# Altium PCB MainBoardCurrent.PcbDoc (part 1 of 2)
Units mil, origin at the board's own origin, x right, y up, seen from the top; angles counter-clockwise.
Board outline 3540 x 3540 mil, 4 copper layers (Top Copper, GND, PWR, Bottom Copper), stack 61.811 mil thick; 59 components, 71 nets, 545 pads, 135 vias.
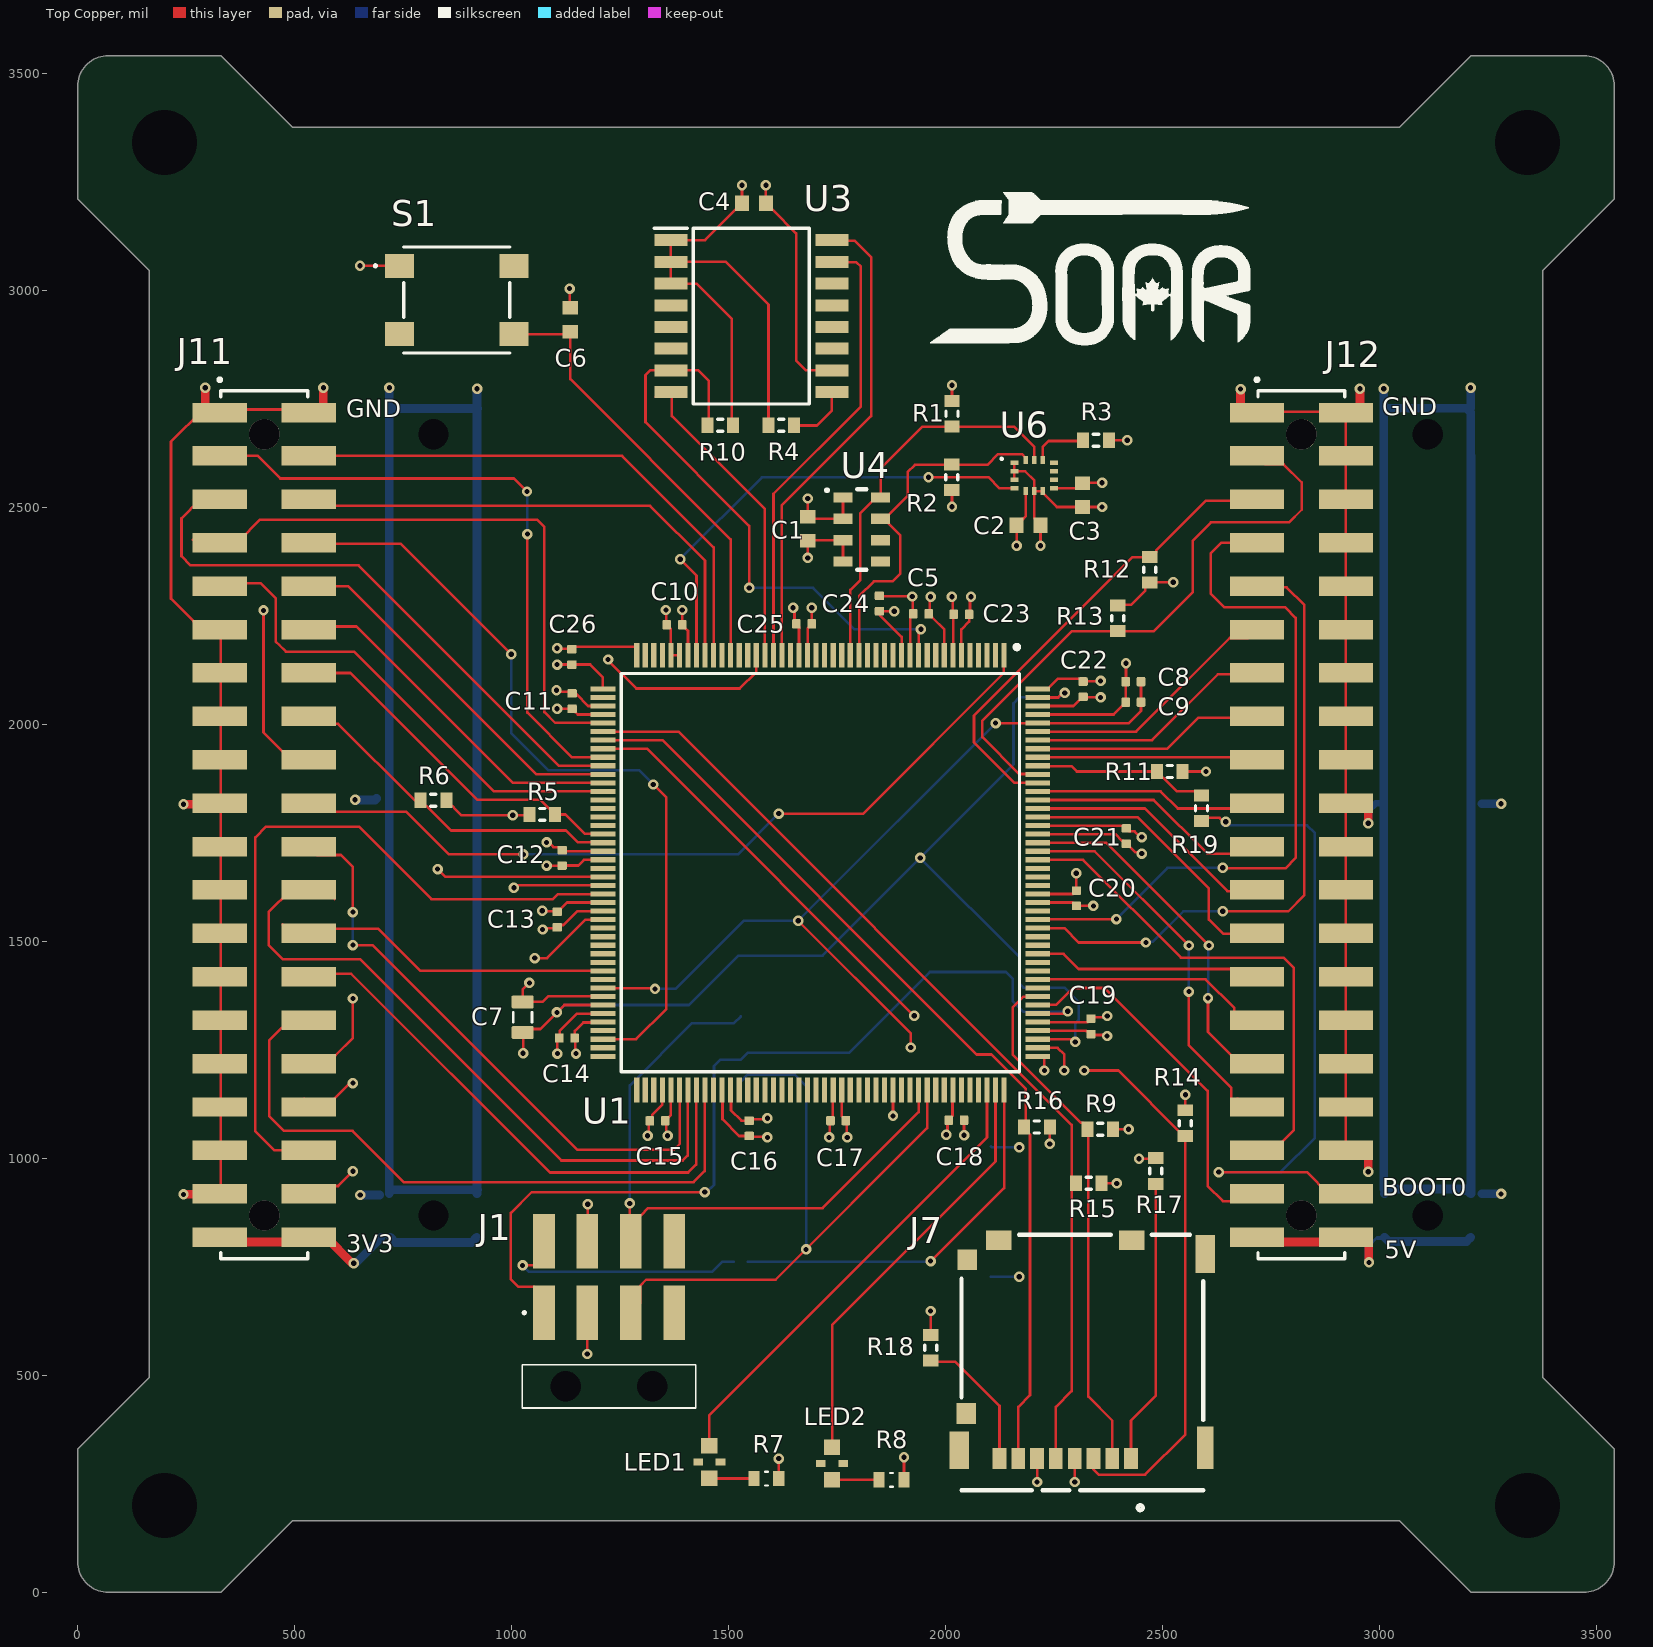
[diagram p0: Top Copper view]
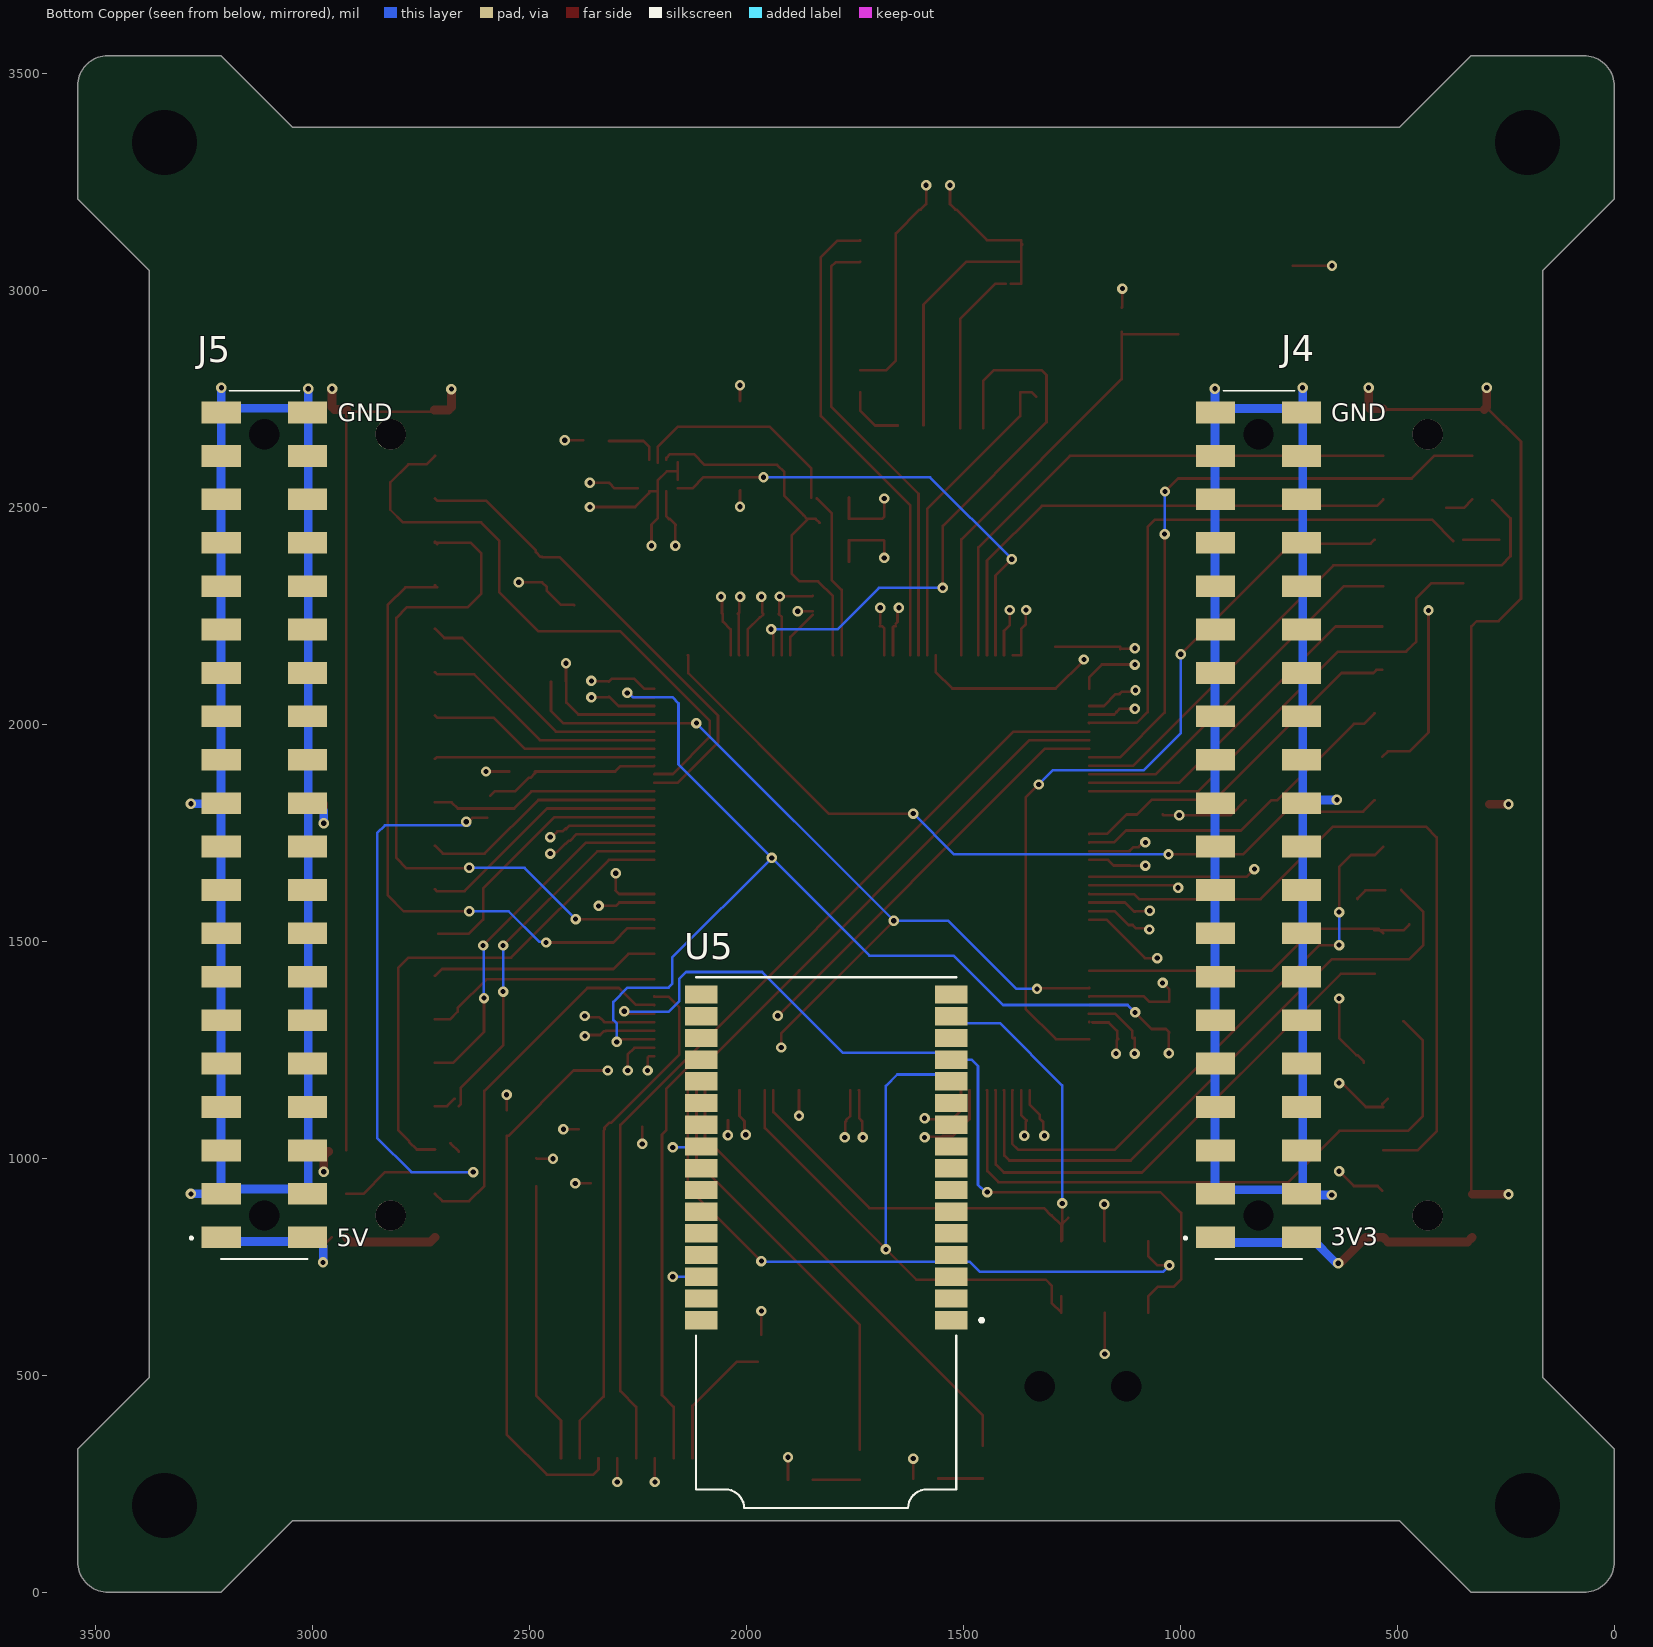
[diagram p1: Bottom Copper view, seen from below]
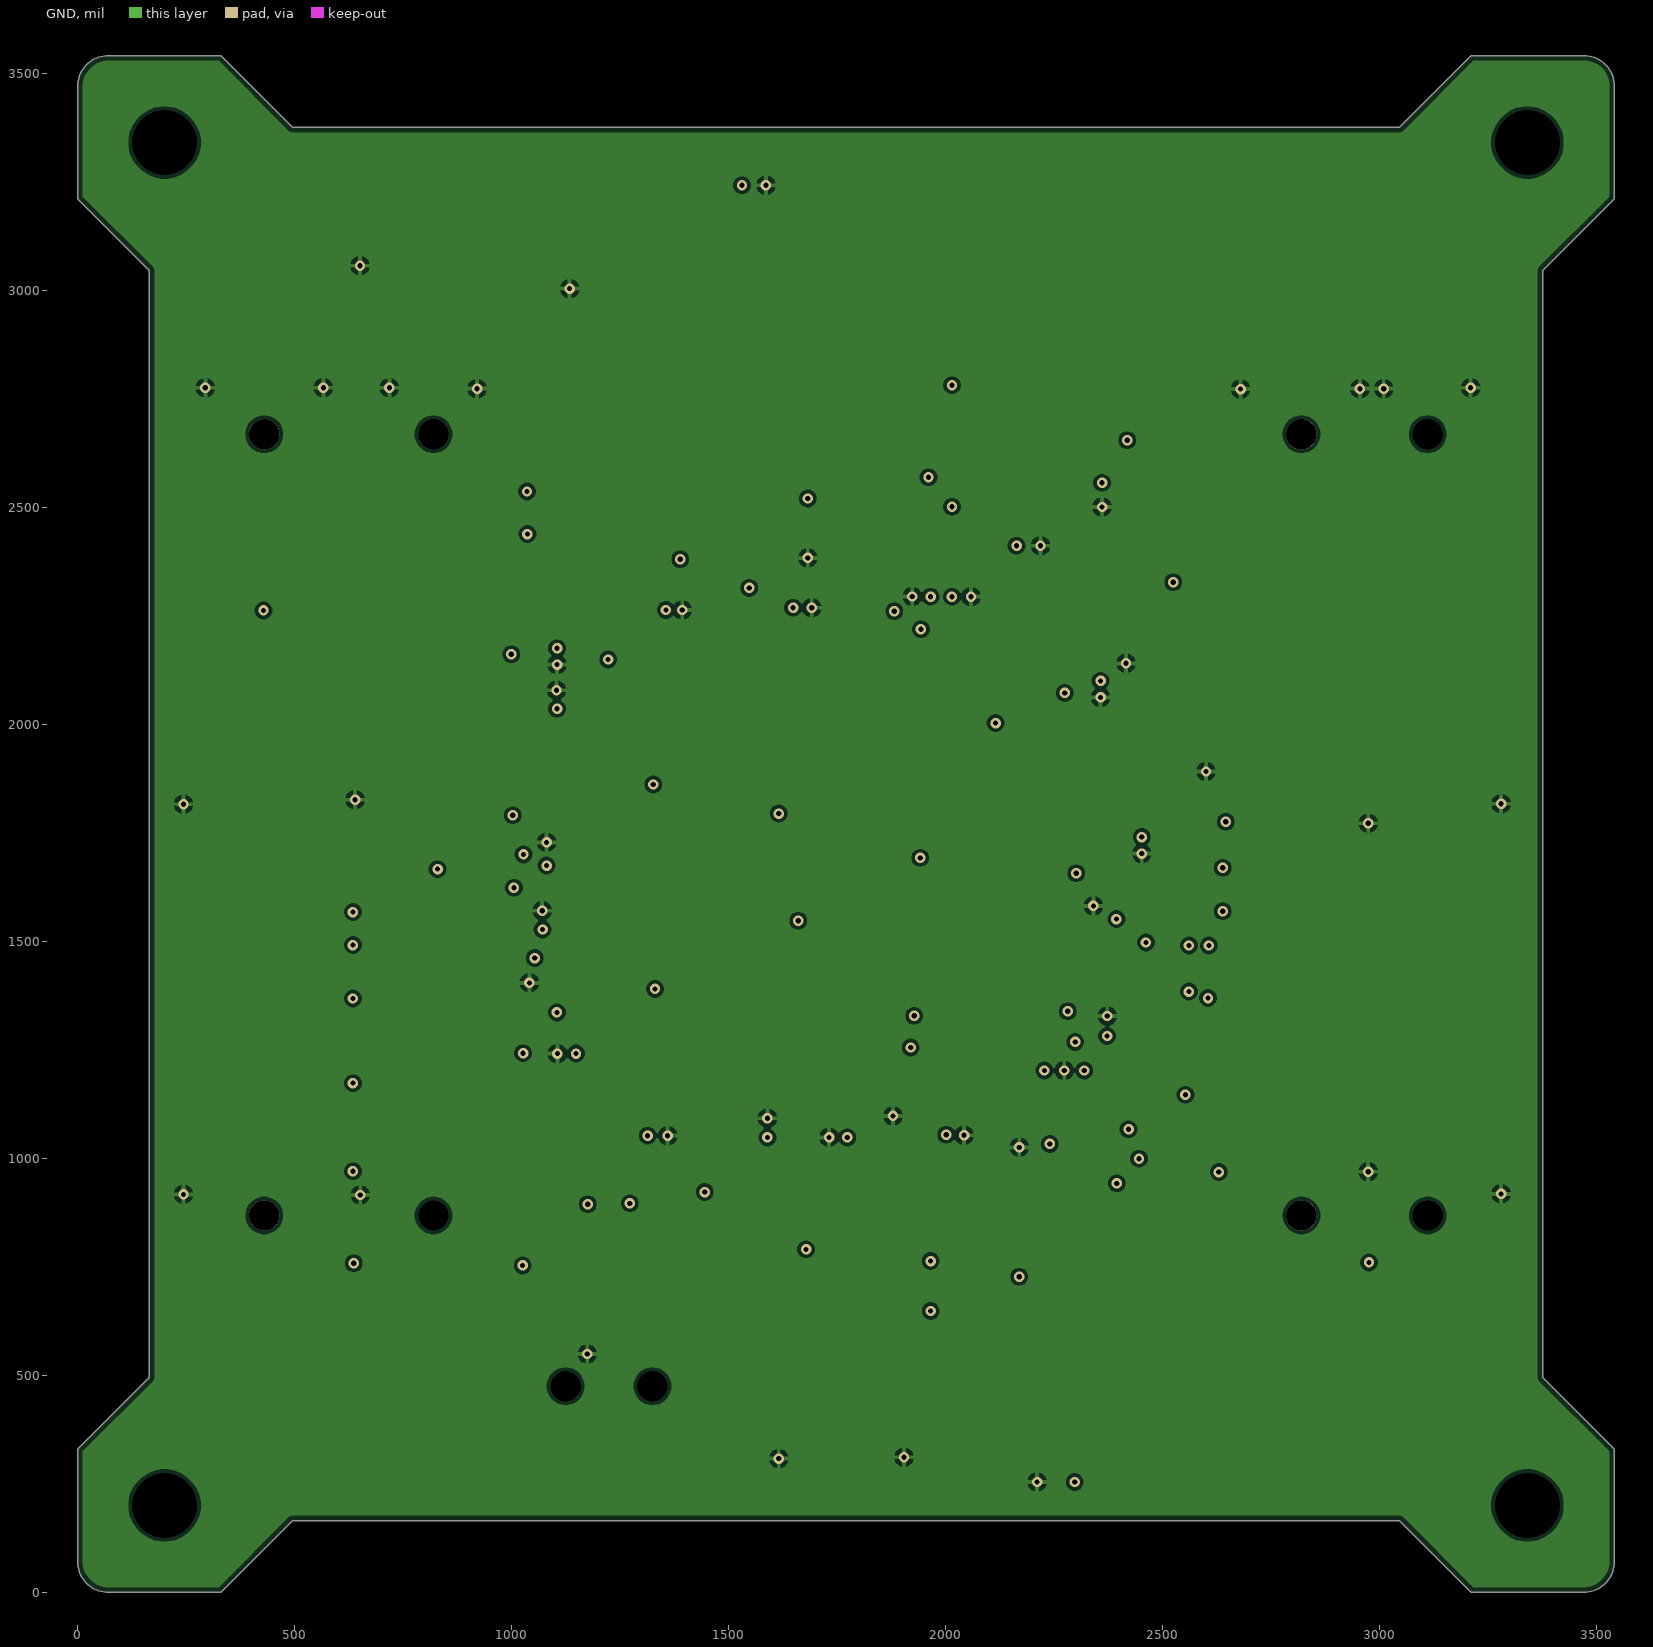
[diagram p2: GND]
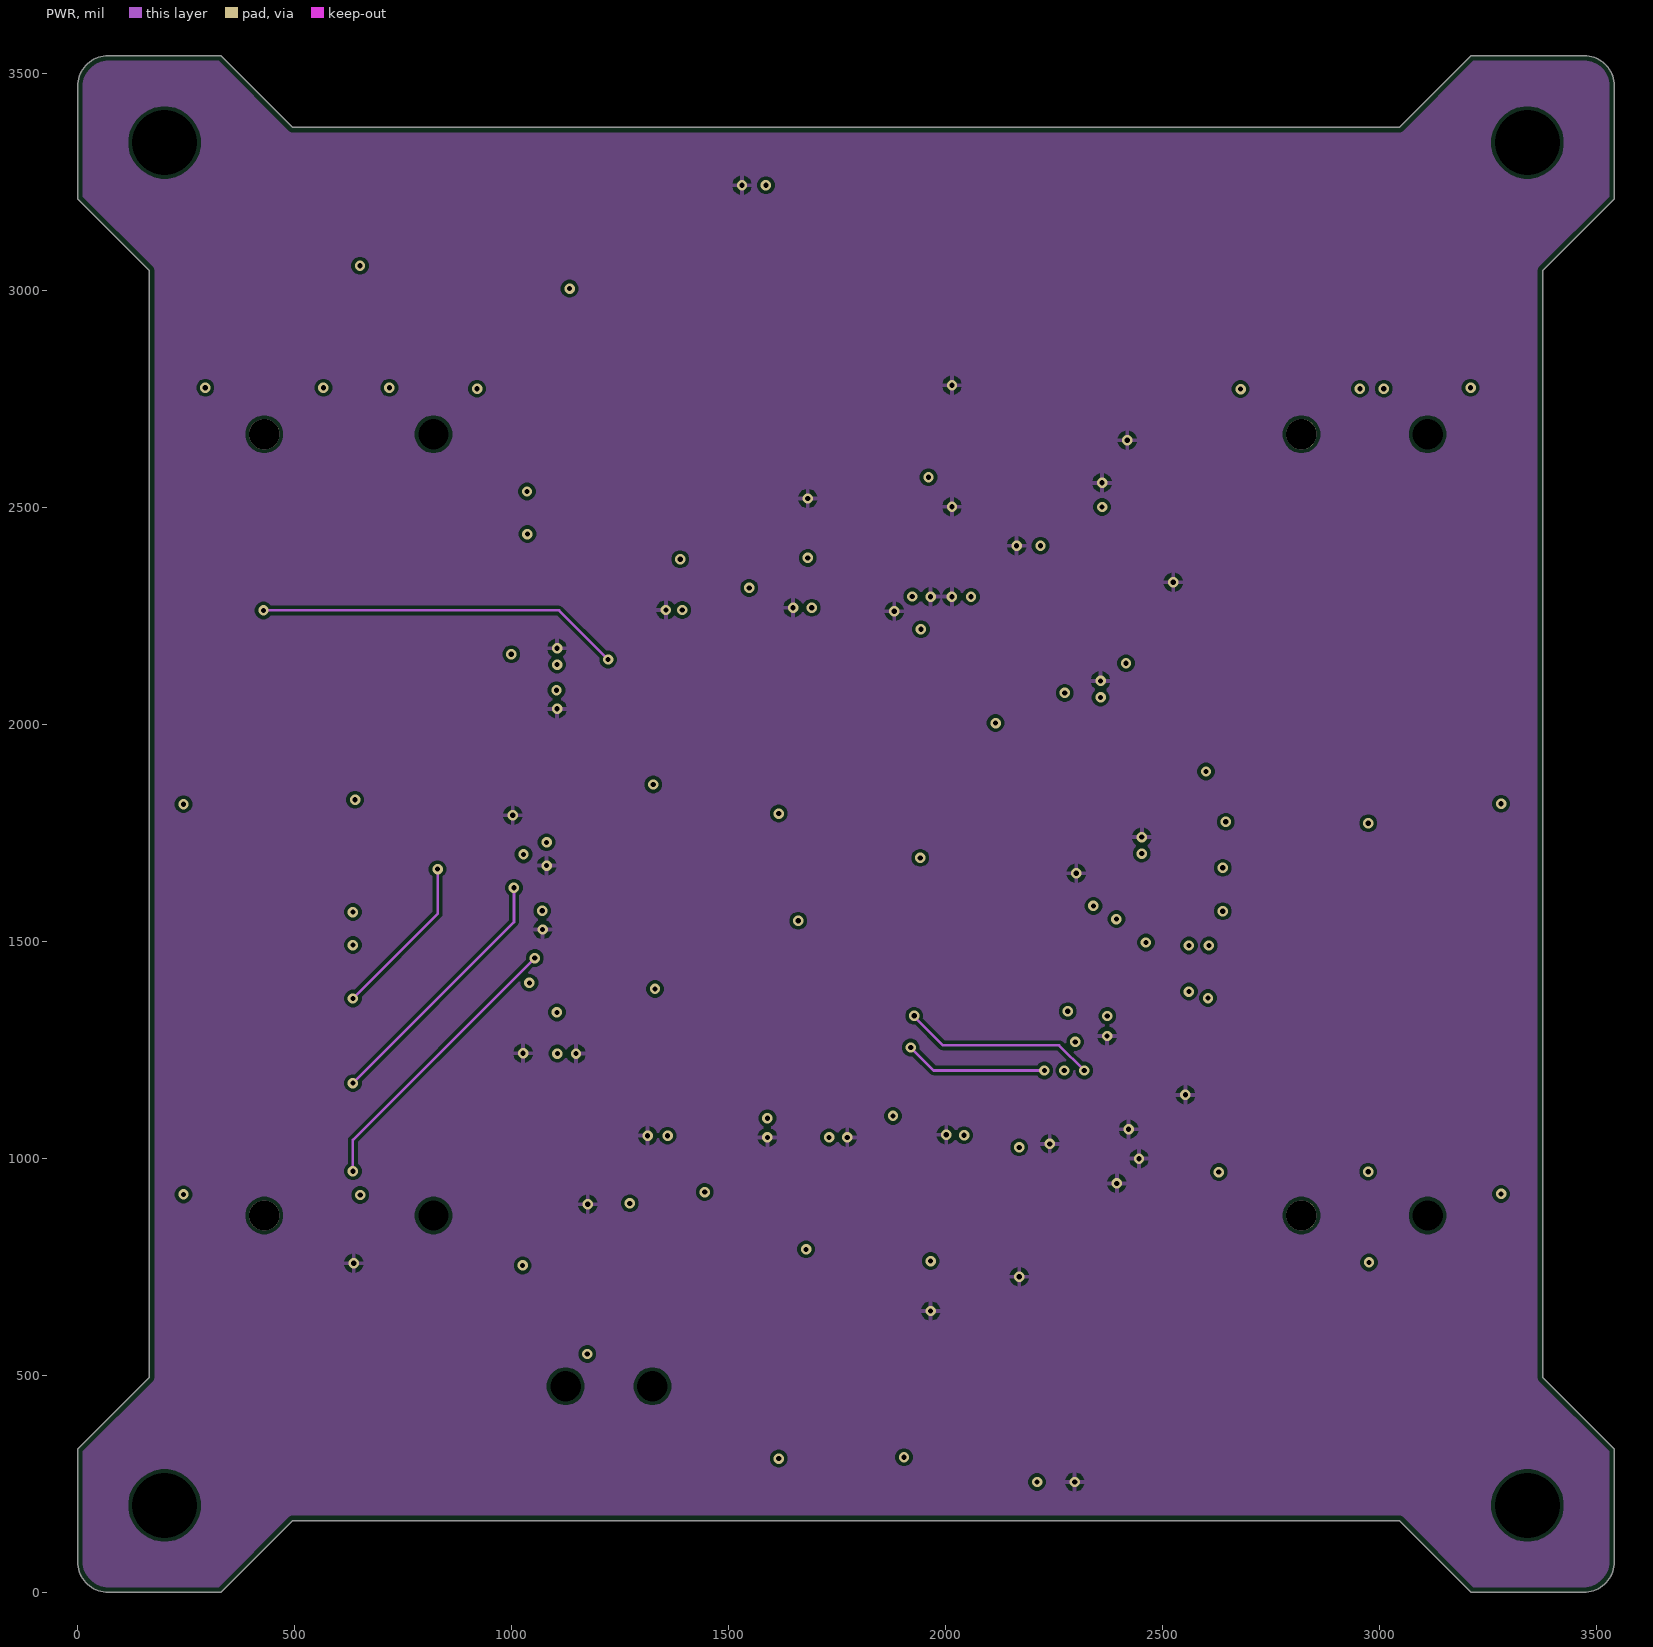
[diagram p3: PWR]

## Layer stack, top to bottom
Top Mask: solder mask 0.591, Solder Resist, Dk 3.8
Top Copper: signal copper 1.378
Dielectric 1: prepreg 7.874, 7628, Dk 4.6
GND: signal copper 0.689
Core: core 41.929, FR-4, Dk 4.5
PWR: signal copper 0.689
Dielectric 2: prepreg 7.874, 7628, Dk 4.6
Bottom Copper: signal copper 1.378
Bottom Mask: solder mask 0.591, Solder Resist, Dk 3.8

## Board outline
0,3470 cw(c70,3470) 70,3540 330,3540 495,3375 3045,3375 3210,3540 3471,3540 cw(c3471,3471) 3540,3471 3540,3210 3375,3045 3375,495 3540,330 3540,70 cw(c3470,70) 3470,0 3210,0 3045,165 495,165 330,0 70,0 cw(c70,70) 0,70 0,330 165,495 165,3045 0,3210

## Design rules (kind name [scope] priority, off if disabled: settings)
BoardOutlineClearance [All] p1: gap=11.81 ignorepadtopadclearanceinfootprint=FALSE except(15.75: Arc-SplitBarrior Arc-SplitContinuation Track-SplitBarrior Track-SplitContinuation SMDPad-SplitBarrior SMDPad-SplitContinuation THPad-SplitBarrior THPad-SplitContinuation Via-SplitBarrior Via-SplitContinuation Fill-SplitBarrior Fill-SplitContinuation Poly-SplitBarrior Poly-SplitContinuation Region-SplitBarrior Region-SplitContinuation Text-SplitBarrior Text-SplitContinuation)
Clearance "Clearance Different Nets" [All] p1: gap=7.87 ignorepadtopadclearanceinfootprint=FALSE except(3.5: Arc-Arc Arc-Track Arc-SMDPad Track-Track Track-SMDPad; 5: SMDPad-SMDPad SMDPad-Via THPad-Via Via-Via; 10: Arc-Via Arc-Text Track-Via Track-Text SMDPad-Text THPad-Text Via-Text Fill-Text Poly-Text Region-Text Text-Text; 19.68: THPad-THPad Via-Hole)
Clearance "Clearance Same Nets" [All] p2: gap=7.87 ignorepadtopadclearanceinfootprint=FALSE except(3.5: Arc-Arc Arc-Track Arc-SMDPad Track-Track Track-SMDPad SMDPad-SMDPad; 5: SMDPad-Via THPad-Via; 10: Arc-Via Arc-Text Track-Via Track-Text SMDPad-Text THPad-Text Via-Via Via-Text Fill-Text Poly-Text Region-Text Text-Text)
Clearance "Clearance Bottom Layer" [OnLayer('Bottom Layer')] p3: gap=8 ignorepadtopadclearanceinfootprint=TRUE except(10: Arc-Text Track-Text SMDPad-Text THPad-Text Via-Text Fill-Text Poly-Text Region-Text Text-Text)
Clearance "Clearance Top Layer" [OnLayer('Top Layer')] p4: gap=8 ignorepadtopadclearanceinfootprint=TRUE except(10: Arc-Text Track-Text SMDPad-Text THPad-Text Via-Text Fill-Text Poly-Text Region-Text Text-Text)
Clearance [All] p5: gap=10 ignorepadtopadclearanceinfootprint=TRUE except(0: Arc-Hole Track-Hole SMDPad-Hole THPad-Hole Via-Hole Fill-Hole Poly-Hole Region-Hole Text-Hole)
HoleSize [All] p1: absolutevalues=TRUE maxlimit=248.03 minlimit=7.87 maxpercent=80.000 minpercent=20.000
MinimumAnnularRing [All] p1: minimumring=5.12
MinimumSolderMaskSliver [All] p1: minsoldermaskwidth=3.5
PolygonConnect PolygonConnect_1 [(HasFootprint('CAPC0805(2012)145_L') AND InNet('3V3'))] p1: thpad.connectstyle=Relief thpad.reliefconductorwidth=10 thpad.reliefentries=4 thpad.polygonreliefangle="90 Angle" thpad.airgapwidth=10 smdpad.connectstyle=Relief smdpad.reliefconductorwidth=10 smdpad.reliefentries=4 smdpad.polygonreliefangle="90 Angle" smdpad.airgapwidth=10 via.connectstyle=NoConnect via.reliefconductorwidth=10 via.reliefentries=4 via.polygonreliefangle="90 Angle" via.airgapwidth=10
PolygonConnect PolygonConnect_7 [All vs IsNamedPolygon('NONET_L03_P003')] p2: thpad.connectstyle=Relief thpad.reliefconductorwidth=10 thpad.reliefentries=4 thpad.polygonreliefangle="90 Angle" thpad.airgapwidth=10 smdpad.connectstyle=Relief smdpad.reliefconductorwidth=10 smdpad.reliefentries=4 smdpad.polygonreliefangle="90 Angle" smdpad.airgapwidth=10 via.connectstyle=Direct via.reliefconductorwidth=10 via.reliefentries=4 via.polygonreliefangle="90 Angle" via.airgapwidth=10
PolygonConnect PWR [All vs IsNamedPolygon('3V3_PWR')] p3: connectstyle=Relief reliefconductorwidth=10 reliefentries=4 polygonreliefangle="90 Angle" airgapwidth=10
PolygonConnect PolygonConnect_3 [All vs IsNamedPolygon('NONET_L03_P003')] p4: thpad.connectstyle=Direct thpad.reliefconductorwidth=10 thpad.reliefentries=4 thpad.polygonreliefangle="90 Angle" thpad.airgapwidth=10 smdpad.connectstyle=Relief smdpad.reliefconductorwidth=10 smdpad.reliefentries=4 smdpad.polygonreliefangle="90 Angle" smdpad.airgapwidth=10 via.connectstyle=Relief via.reliefconductorwidth=10 via.reliefentries=4 via.polygonreliefangle="90 Angle" via.airgapwidth=10
PolygonConnect [All] p5: connectstyle=Relief reliefconductorwidth=10 reliefentries=4 polygonreliefangle="90 Angle" airgapwidth=10
RoutingCorners [All] p1: cornerstyle=Round minsetback=100 maxsetback=100
RoutingVias [All] p1: holewidth=19.68 width=39.37 viastyle="Through Hole" minholewidth=7.87 minwidth=13.78 maxholewidth=39.37 maxwidth=78.74
SilkToSilkClearance [All] p1: silktosilkclearance=3.94
SilkToSolderMaskClearance [IsPad] p1: minsilkscreentomaskgap=3.94 clearancetoexposedcopper=TRUE
SolderMaskExpansion [All] p1: expansion=2 istentingtop=FALSE
Width [All] p1: maxlimit=100 minlimit=3.5 preferedwidth=15
Width RF [InNetClass('RF')] p2: maxlimit=20 minlimit=6 preferedwidth=10 minimp=50.000000 maximp=50.000000 favimp=50.000000
Width Width_1 [All] p3: maxlimit=20 minlimit=6 preferedwidth=6 minimp=50.000000 maximp=50.000000 favimp=50.000000
25 further rules are at their usual default settings.

## Classes and differential pairs
polygon class Top_GND: STLINK-GND_L03_P003

## Components (designator, comment, footprint, x,y, rotation, side; value= is the part's Value field where it differs from the comment)
C1 "0.1uF" 1608[0603] 1682,2450 r90 top
C2 "0.1uF" 1608[0603] 2190.56,2458 r0 top
C3 "0.1uF" 1608[0603] 2314.92,2527.81 r90 top
C4 "0.1uF" 1608[0603] 1558,3200 r180 top
C5 "Capacitor 100nF +/-20% 25V 0402" CAPC0402(1005)60_L 1942.69,2254.15 r180 top value=100nF
C6 "0.1uF" 1608[0603] 1135,2932 r270 top
C7 "Capacitor 4.7µF +/-40% 25V 0805" CAPC0805(2012)145_L 1025,1325 r90 top value=4.7µF
C8 "Capacitor 2,2µF +/-20% 10V 0402" CAPC0402(1005)60_L 2431.95,2098.12 r180 top value=2.2µF
C9 "Capacitor 2,2µF +/-20% 10V 0402" CAPC0402(1005)60_L 2431.95,2050.71 r180 top value=2.2µF
C10 "Capacitor 100nF +/-20% 25V 0402" CAPC0402(1005)60_L 1375,2229 r0 top value=100nF
C11 "Capacitor 100nF +/-20% 25V 0402" CAPC0402(1005)60_L 1139,2053 r90 top value=100nF
C12 "Capacitor 100nF +/-20% 25V 0402" CAPC0402(1005)60_L 1116,1692 r90 top value=100nF
C13 "Capacitor 100nF +/-20% 25V 0402" CAPC0402(1005)60_L 1104.51,1549.73 r90 top value=100nF
C14 "Capacitor 100nF +/-20% 25V 0402" CAPC0402(1005)60_L 1127,1277 r180 top value=100nF
C15 "Capacitor 100nF +/-20% 25V 0402" CAPC0402(1005)60_L 1335.9,1086 r0 top value=100nF
C16 "Capacitor 100nF +/-20% 25V 0402" CAPC0402(1005)60_L 1547,1069 r90 top value=100nF
C17 "Capacitor 100nF +/-20% 25V 0402" CAPC0402(1005)60_L 1752,1086.72 r180 top value=100nF
C18 "Capacitor 100nF +/-20% 25V 0402" CAPC0402(1005)60_L 2024.2,1087.57 r0 top value=100nF
C19 "Capacitor 100nF +/-20% 25V 0402" CAPC0402(1005)60_L 2334.36,1303.83 r90 top value=100nF
C20 "Capacitor 100nF +/-20% 25V 0402" CAPC0402(1005)60_L 2301,1599 r270 top value=100nF
C21 "Capacitor 100nF +/-20% 25V 0402" CAPC0402(1005)60_L 2416,1742 r270 top value=100nF
C22 "Capacitor 100nF +/-20% 25V 0402" CAPC0402(1005)60_L 2316.14,2080.55 r270 top value=100nF
C23 "Capacitor 100nF +/-20% 25V 0402" CAPC0402(1005)60_L 2035.8,2252.96 r0 top value=100nF
C24 "Capacitor 100nF +/-20% 25V 0402" CAPC0402(1005)60_L 1847,2278 r90 top value=100nF
C25 "Capacitor 100nF +/-20% 25V 0402" CAPC0402(1005)60_L 1673.44,2231.11 r0 top value=100nF
C26 "Capacitor 100nF +/-20% 25V 0402" CAPC0402(1005)60_L 1138.28,2155.09 r270 top value=100nF
J1 "TSM-104-02-F-DH-A-P-TR" TSM-104-ZZ-YYY-DH-A-P-TR 1224,726.48 r180 top
J4 "HLE-120-02-L-DV-A" HLE-120-02-XXX-DV-A 819.59,1768 r270 bottom
J5 "HLE-120-02-L-DV-A" HLE-120-02-XXX-DV-A 3110,1768 r270 bottom
J7 "503182-1852" 5031821852 2314.52,333.26 r180 top
J11 "HW-20-16-L-D-250-SM-A-TR" SAMTEC_HW-20-16-L-D-250-SM-A-TR 327.25,2718 r270 top
J12 "HW-20-16-L-D-250-SM-A-TR" SAMTEC_HW-20-16-L-D-250-SM-A-TR 2716.78,2718 r270 top
LED1 "APTD2012LZGCK" FIL_0805J0500471MATE03 1455,300 r90 top
LED2 "APTD2012LQBC_D" FIL_0805J0500471MATE03 1738,297 r90 top
R1 "10K" J1-0603 2014.21,2715 r90 top value=1K
R2 "10K" J1-0603 2013.26,2568.59 r270 top value=1K
R3 "10K" J1-0603 2346,2654 r0 top value=1K
R4 "10K" J1-0603 1621,2689 r0 top value=1K
R5 "10K" J1-0603 1070,1792 r180 top value=1K
R6 "10K" J1-0603 819.59,1824.99 r0 top value=1K
R7 "800" RES_ERJU03F6800V 1586.46,262 r0 top value=1K
R8 "175" RES_ERJU03F6800V 1875,259 r0 top value=1K
R9 "10K" J1-0603 2356,1066.59 r0 top value=1K
R10 "10K" J1-0603 1480,2689 r0 top value=1K
R11 "10K" J1-0603 2516,1891 r180 top value=1K
R12 "10K" J1-0603 2470,2356 r270 top value=1K
R13 "10K" J1-0603 2396,2244 r90 top value=1K
R14 "10K" J1-0603 2552,1081 r90 top value=1K
R15 "10K" J1-0603 2329,942.06 r0 top value=1K
R16 "10K" J1-0603 2209.98,1071.92 r0 top value=1K
R17 "10K" J1-0603 2484,970.59 r90 top value=1K
R18 "10K" J1-0603 1965,563.53 r90 top value=1K
R19 "0" J1-0603 2589,1806 r90 top value=1K
S1 "430473035826" 430473035826 872.89,2977.26 r0 top
U1 "STM32H747IGT6" QFP50P2600X2600X160-176N 1711,1658 r270 top
U3 "W25Q256JVFIQ" SOIC127P1032X264-16N 1552,2940 r0 top
U4 "MS561101BA03-50" MS561101BA03-50 1806.31,2448.39 r0 top
U5 "STLINK-V3MODS" MODULE_STLINK-V3MODS 1815.81,237 r0 bottom
U6 "LSM6DSOTR" LGA-14(2.5X3X0.86) 2203.77,2572.84 r0 top

## Footprints (in the part's own frame and the unit in brackets; to place one, negate y for a bottom-side part, rotate by r counter-clockwise, add the part's x,y. Pads: shape width x height; smd on the part's side, far side on the other; paste and mask are expansions set on the pad)
1608[0603] [mm] "Chip Capacitor, Body 1.6x0.8mm, IPC High Density"
  rect 0.8x0.9 smd: 1(-0.7,0) 2(0.7,0)
  body extent -0.87,-0.48 0.87,0.48, height 1.3
5031821852 [mm]
  rect 0.8x1.24 smd: 1(-2.85,0.63) 2(-1.75,0.63) 3(-0.65,0.63) 4(0.45,0.63) 5(1.55,0.63) 6(2.65,0.63) 7(3.75,0.63) 8(4.85,0.63)
  rect 0.95x2.5 smd: 9(-7.195,0)
  rect 1.15x2.2 smd: 10(7.195,0.15) 15(-7.195,-11.33)
  rect 1.16x1.25 smd: 11(6.795,-2)
  rect 1.16x1.2 smd: 12(6.74,-11)
  rect 1.5x1.15 smd: 13(4.89,-12.125) 14(-2.89,-12.125)
  silkscreen extent -7.07,-12.45 7.07,3.66, body extent -7.47,-12.4 7.47,2.55, height 1.51
430473035826 [mm]
  rect 1.7x1.4 smd: 1(-3.35,2) 2(3.35,2) 3(-3.35,-2) 4(3.35,-2)
  silkscreen extent -4.8,-3.1 3.1,3.1, body extent -4.06,-3.1 4.06,3.1, height 3.8
CAPC0402(1005)60_L [mm] "Chip Capacitor, Body 1.0x0.5mm, Height 0.6mm, IPC High Density"
  rrect25% 0.5x0.55 smd: 1(-0.45,0) 2(0.45,0)
  body extent -0.5,-0.25 0.5,0.25, height 0.6
CAPC0805(2012)145_L [mm] "Chip Capacitor, Body 2.0x1.2mm, Height 1.45mm, IPC High Density"
  rrect25% 0.76x1.3 smd: 1(-0.9,0) 2(0.89,0)
  silkscreen extent -0.3,-0.55 0.28,0.55, body extent -1,-0.6 1,0.6, height 1.45
FIL_0805J0500471MATE03 [mm]
  rect 0.9x0.95 smd: 1(-0.95,0) 2(0.95,0)
  rect 0.4x0.56 smd: 3(0,0.655) 4(0,-0.655)
HLE-120-02-XXX-DV-A [mm]
  rect 1.27x2.29 smd: 1(24.13,-2.525) 2(24.13,2.525) 3(21.59,-2.525) 4(21.59,2.525) 5(19.05,-2.525) 6(19.05,2.525) 7(16.51,-2.525) 8(16.51,2.525) 9(13.97,-2.525) 10(13.97,2.525) 11(11.43,-2.525) 12(11.43,2.525) 13(8.89,-2.525) 14(8.89,2.525) 15(6.35,-2.525) 16(6.35,2.525) 17(3.81,-2.525) 18(3.81,2.525) 19(1.27,-2.525) 20(1.27,2.525) 21(-1.27,-2.525) 22(-1.27,2.525) 23(-3.81,-2.525) 24(-3.81,2.525) 25(-6.35,-2.525) 26(-6.35,2.525) 27(-8.89,-2.525) 28(-8.89,2.525) 29(-11.43,-2.525) 30(-11.43,2.525) 31(-13.97,-2.525) 32(-13.97,2.525) 33(-16.51,-2.525) 34(-16.51,2.525) 35(-19.05,-2.525) 36(-19.05,2.525) 37(-21.59,-2.525) 38(-21.59,2.525) 39(-24.13,-2.525) 40(-24.13,2.525)
  round 0.89 hole 1.78 unplated: 41(22.86,0) 42(-22.86,0)
  silkscreen extent -25.4,-4.33 25.4,2.54
J1-0603 [mm] "Chip Resistor, Body 1.6x0.8mm, IPC High Density"
  rect 0.7x0.9 smd: 1(-0.75,0) 2(0.75,0)
  silkscreen extent -0.15,-0.35 0.15,0.35, body extent -0.85,-0.48 0.85,0.48, height 0.9
LGA-14(2.5X3X0.86) [mm]
  rect 0.475x0.25 smd: 1(-1.162,0.75) 2(-1.162,0.25) 3(-1.162,-0.25) 4(-1.162,-0.75) 8(1.162,-0.75) 9(1.162,-0.25) 10(1.162,0.25) 11(1.162,0.75)
  rect 0.25x0.475 smd: 5(-0.5,-0.913) 6(0,-0.913) 7(0.5,-0.913) 12(0.5,0.912) 13(0,0.912) 14(-0.5,0.912)
  silkscreen extent -1.93,0.95 -1.88,1.01, body extent -1.5,-1.25 1.5,1.25, height 0.86
MODULE_STLINK-V3MODS [mil]
  rect 74.8x42.13 smd: 1(-288.19,-390) 2(-288.19,-440) 3(-288.19,-490) 4(-288.19,-540) 5(-288.19,-590) 6(-288.19,-640) 7(-288.19,-690) 8(-288.19,-740) 9(-288.19,-790) 10(-288.19,-840) 11(-288.19,-890) 12(-288.19,-940) 13(-288.19,-990) 14(-288.19,-1040) 15(-288.19,-1090) 16(-288.19,-1140) 17(288.19,-1140) 18(288.19,-1090) 19(288.19,-1040) 20(288.19,-990) 21(288.19,-940) 22(288.19,-890) 23(288.19,-840) 24(288.19,-790) 25(288.19,-740) 26(288.19,-690) 27(288.19,-640) 28(288.19,-590) 29(288.19,-540) 30(288.19,-490) 31(288.19,-440) 32(288.19,-390)
  silkscreen extent -362,-1180 300,43
MS561101BA03-50 [mm]
  rect 1.1x0.6 smd: 1(-1.1,1.875) 2(-1.1,0.625) 3(-1.1,-0.625) 4(-1.1,-1.875) 5(1.1,-1.875) 6(1.1,-0.625) 7(1.1,0.625) 8(1.1,1.875)
  silkscreen extent -2.08,-2.35 0.27,2.35, body extent -1.5,-2.5 1.5,2.5, height 0.95
QFP50P2600X2600X160-176N [mm]
  rect 1.45x0.3 smd: 1(-12.725,10.75) 2(-12.725,10.25) 3(-12.725,9.75) 4(-12.725,9.25) 5(-12.725,8.75) 6(-12.725,8.25) 7(-12.725,7.75) 8(-12.725,7.25) 9(-12.725,6.75) 10(-12.725,6.25) 11(-12.725,5.75) 12(-12.725,5.25) 13(-12.725,4.75) 14(-12.725,4.25) 15(-12.725,3.75) 16(-12.725,3.25) 17(-12.725,2.75) 18(-12.725,2.25) 19(-12.725,1.75) 20(-12.725,1.25) 21(-12.725,0.75) 22(-12.725,0.25) 23(-12.725,-0.25) 24(-12.725,-0.75) 25(-12.725,-1.25) 26(-12.725,-1.75) 27(-12.725,-2.25) 28(-12.725,-2.75) 29(-12.725,-3.25) 30(-12.725,-3.75) 31(-12.725,-4.25) 32(-12.725,-4.75) 33(-12.725,-5.25) 34(-12.725,-5.75) 35(-12.725,-6.25) 36(-12.725,-6.75) 37(-12.725,-7.25) 38(-12.725,-7.75) 39(-12.725,-8.25) 40(-12.725,-8.75) 41(-12.725,-9.25) 42(-12.725,-9.75) 43(-12.725,-10.25) 44(-12.725,-10.75) 89(12.725,-10.75) 90(12.725,-10.25) 91(12.725,-9.75) 92(12.725,-9.25) 93(12.725,-8.75) 94(12.725,-8.25) 95(12.725,-7.75) 96(12.725,-7.25) 97(12.725,-6.75) 98(12.725,-6.25) 99(12.725,-5.75) 100(12.725,-5.25) 101(12.725,-4.75) 102(12.725,-4.25) 103(12.725,-3.75) 104(12.725,-3.25) 105(12.725,-2.75) 106(12.725,-2.25) 107(12.725,-1.75) 108(12.725,-1.25) 109(12.725,-0.75) 110(12.725,-0.25) 111(12.725,0.25) 112(12.725,0.75) 113(12.725,1.25) 114(12.725,1.75) 115(12.725,2.25) 116(12.725,2.75) 117(12.725,3.25) 118(12.725,3.75) 119(12.725,4.25) 120(12.725,4.75) 121(12.725,5.25) 122(12.725,5.75) 123(12.725,6.25) 124(12.725,6.75) 125(12.725,7.25) 126(12.725,7.75) 127(12.725,8.25) 128(12.725,8.75) 129(12.725,9.25) 130(12.725,9.75) 131(12.725,10.25) 132(12.725,10.75)
  rect 0.3x1.45 smd: 45(-10.75,-12.725) 46(-10.25,-12.725) 47(-9.75,-12.725) 48(-9.25,-12.725) 49(-8.75,-12.725) 50(-8.25,-12.725) 51(-7.75,-12.725) 52(-7.25,-12.725) 53(-6.75,-12.725) 54(-6.25,-12.725) 55(-5.75,-12.725) 56(-5.25,-12.725) 57(-4.75,-12.725) 58(-4.25,-12.725) 59(-3.75,-12.725) 60(-3.25,-12.725) 61(-2.75,-12.725) 62(-2.25,-12.725) 63(-1.75,-12.725) 64(-1.25,-12.725) 65(-0.75,-12.725) 66(-0.25,-12.725) 67(0.25,-12.725) 68(0.75,-12.725) 69(1.25,-12.725) 70(1.75,-12.725) 71(2.25,-12.725) 72(2.75,-12.725) 73(3.25,-12.725) 74(3.75,-12.725) 75(4.25,-12.725) 76(4.75,-12.725) 77(5.25,-12.725) 78(5.75,-12.725) 79(6.25,-12.725) 80(6.75,-12.725) 81(7.25,-12.725) 82(7.75,-12.725) 83(8.25,-12.725) 84(8.75,-12.725) 85(9.25,-12.725) 86(9.75,-12.725) 87(10.25,-12.725) 88(10.75,-12.725) 133(10.75,12.725) 134(10.25,12.725) 135(9.75,12.725) 136(9.25,12.725) 137(8.75,12.725) 138(8.25,12.725) 139(7.75,12.725) 140(7.25,12.725) 141(6.75,12.725) 142(6.25,12.725) 143(5.75,12.725) 144(5.25,12.725) 145(4.75,12.725) 146(4.25,12.725) 147(3.75,12.725) 148(3.25,12.725) 149(2.75,12.725) 150(2.25,12.725) 151(1.75,12.725) 152(1.25,12.725) 153(0.75,12.725) 154(0.25,12.725) 155(-0.25,12.725) 156(-0.75,12.725) 157(-1.25,12.725) 158(-1.75,12.725) 159(-2.25,12.725) 160(-2.75,12.725) 161(-3.25,12.725) 162(-3.75,12.725) 163(-4.25,12.725) 164(-4.75,12.725) 165(-5.25,12.725) 166(-5.75,12.725) 167(-6.25,12.725) 168(-6.75,12.725) 169(-7.25,12.725) 170(-7.75,12.725) 171(-8.25,12.725) 172(-8.75,12.725) 173(-9.25,12.725) 174(-9.75,12.725) 175(-10.25,12.725) 176(-10.75,12.725)
  silkscreen extent -13.32,-11.65 11.65,11.65
RES_ERJU03F6800V [mm]
  rect 0.65x0.9 smd: 1(-0.725,0) 2(0.725,0)
  silkscreen extent -0.08,-0.4 0.08,0.4
SAMTEC_HW-20-16-L-D-250-SM-A-TR [mm]
  rect 1.14x3.175 smd: 01(0,0) 02(0,5.205) 03(2.54,0) 04(2.54,5.205) 05(5.08,0) 06(5.08,5.205) 07(7.62,0) 08(7.62,5.205) 09(10.16,0) 10(10.16,5.205) 11(12.7,0) 12(12.7,5.205) 13(15.24,0) 14(15.24,5.205) 15(17.78,0) 16(17.78,5.205) 17(20.32,0) 18(20.32,5.205) 19(22.86,0) 20(22.86,5.205) 21(25.4,0) 22(25.4,5.205) 23(27.94,0) 24(27.94,5.205) 25(30.48,0) 26(30.48,5.205) 27(33.02,0) 28(33.02,5.205) 29(35.56,0) 30(35.56,5.205) 31(38.1,0) 32(38.1,5.205) 33(40.64,0) 34(40.64,5.205) 35(43.18,0) 36(43.18,5.205) 37(45.72,0) 38(45.72,5.205) 39(48.26,0) 40(48.26,5.205)
  round 1.78 hole 1.78 unplated: ""(1.27,2.603) ""(46.99,2.603)
  silkscreen extent -2.02,-0.1 49.53,5.14
SOIC127P1032X264-16N [mm]
  rect 1.93x0.7 smd: 1(-4.71,4.445) 2(-4.71,3.175) 3(-4.71,1.905) 4(-4.71,0.635) 5(-4.71,-0.635) 6(-4.71,-1.905) 7(-4.71,-3.175) 8(-4.71,-4.445) 9(4.71,-4.445) 10(4.71,-3.175) 11(4.71,-1.905) 12(4.71,-0.635) 13(4.71,0.635) 14(4.71,1.905) 15(4.71,3.175) 16(4.71,4.445)
  silkscreen extent -5.68,-5.14 3.4,5.15, body extent -5.16,-5.14 5.16,5.14, height 2.64
TSM-104-ZZ-YYY-DH-A-P-TR [mm]
  rect 1.27x3.18 smd: 1(3.81,2.095) 2(3.81,-2.095) 3(1.27,2.095) 4(1.27,-2.095) 5(-1.27,2.095) 6(-1.27,-2.095) 7(-3.81,2.095) 8(-3.81,-2.095)
  round 0.89 hole 1.78 unplated: 9(2.54,6.4) 10(-2.54,6.4)
  silkscreen extent -5.08,2.05 5.08,7.67

## Part data
C1 C2 C3 C4 C6: library part Cap, "Capacitor", LatestRevisionDate=17-Jul-2002, LatestRevisionNote="Re-released for DXP Platform.", PackageDescription="Radial Cap, Thru-Hole; 2 Leads; 0.3 in Pin Spacing", PackageReference=RAD-0.3, Published=8-Jun-2000, Publisher="Altium Limited"
C5 C10 C11 C12 C13 C14 C15 C16 C17 C18 C19 C20 C21 C22 C23 C24 C25 C26: library part CMP-001-00065-4, "Chip Capacitor, 100nF +/-20%, 25V, 0402, Thickness 0.6 mm", Case/Package=0402, Max Operating Temperature=85°C, Min Operating Temperature=-55°C, Tolerance=10%, Voltage Rating=25V, Mounting Technology=SMT, Pins=2
C7: library part CMP-001-00080-4, "Chip Capacitor, 4.7µF +/-40%, 25V, 0805, Thickness 1.45 mm", Case/Package=0805, Max Operating Temperature=85°C, Min Operating Temperature=-55°C, Tolerance=20%, Voltage Rating=25V, Mounting Technology=SMT, Pins=2
C8 C9: library part CMP-001-00056-4, "Chip Capacitor, 2,2µF +/-20%, 10V, 0402, Thickness 0.6 mm", Case/Package=0402, Max Operating Temperature=85°C, Min Operating Temperature=-55°C, Tolerance=10%, Voltage Rating=10V, Mounting Technology=SMT, Pins=2
J1: "Connector", Manufacturer_Name=SAMTEC, Datasheet Link=http://suddendocs.samtec.com/prints/tsm-1xx-xx-xxx-xx-xx-xxx-xx-mkt1.pdf, Manufacturer_Part_Number=TSM-104-02-F-DH-A-P-TR
J4 J5: "Connector", Manufacturer_Name=SAMTEC, Mouser Part Number=200-HLE12002LDVA, Arrow Part Number=HLE-120-02-L-DV-A, Arrow Price/Stock=https://www.arrow.com/en/products/hle-120-02-l-dv-a/samtec?region=nac, Datasheet Link=http://suddendocs.samtec.com/prints/hle-1xx-02-xxx-dv-xx-xx-xx-mkt.pdf, Manufacturer_Part_Number=HLE-120-02-L-DV-A, Mouser Price/Stock=https://www.mouser.co.uk/ProductDetail/Samtec/HLE-120-02-L-DV-A?qs=0lQeLiL1qyZq0rwGrAI%2FeQ%3D%3D
J7: "Connector", Manufacturer_Name=Molex, Mouser Part Number=538-503182-1852, Datasheet Link=https://www.molex.com/pdm_docs/sd/5031821852_sd.pdf, Manufacturer_Part_Number=503182-1852, Mouser Price/Stock=https://www.mouser.co.uk/ProductDetail/Molex/503182-1852?qs=s7UCm7gO1bZmpyAhCKZ26g%3D%3D
J11 J12: Package=None, Availability=Unavailable, MP=HW-20-16-L-D-250-SM-A-TR, Price=None
LED1: "LED", Manufacturer_Name=Kingbright, Mouser Part Number=604-APTD2012LZGCK, Arrow Part Number=APTD2012LZGCK, Arrow Price/Stock=https://www.arrow.com/en/products/aptd2012lzgck/kingbright?region=nac, Datasheet Link=http://www.kingbrightusa.com/images/catalog/SPEC/APTD2012LZGCK.pdf, Height=1.05mm, Manufacturer_Part_Number=APTD2012LZGCK, Mouser Price/Stock=https://www.mouser.co.uk/ProductDetail/Kingbright/APTD2012LZGCK?qs=AQlKX63v8RvUnlqpSGhMeA%3D%3D
LED2: "LED", Arrow Part Number=APTD2012LQBC/D, Manufacturer_Name=Kingbright, Mouser Part Number=604-APTD2012LQBCD, Arrow Price/Stock=https://www.arrow.com/en/products/aptd2012lqbcd/kingbright, Datasheet Link=https://componentsearchengine.com/Datasheets/1/APTD2012LQBC_D.pdf, Height=1.2mm, Manufacturer_Part_Number=APTD2012LQBC/D, Mouser Price/Stock=https://www.mouser.co.uk/ProductDetail/Kingbright/APTD2012LQBC-D?qs=AQlKX63v8RvDGqprk6aUCg%3D%3D
R1 R2 R3 R4 R5 R6 R7 R8 R9 R10 R11 R12 R13 R14 R15 R16 R17 R18 R19: library part Res3, "Resistor", LatestRevisionDate=29-May-2009, LatestRevisionNote="IPC-7351 Footprint Added.", PackageDescription="Chip Resistor", PackageReference=J1-0603, Published=8-Jun-2000, Publisher="Altium Limited"
S1: "Switch", Manufacturer_Name="Wurth Elektronik", Mouser Part Number=710-430473035826, Datasheet Link=https://componentsearchengine.com/Datasheets/2/430473035826.pdf, Height=3.7mm, Manufacturer_Part_Number=430473035826, Mouser Price/Stock=https://www.mouser.co.uk/ProductDetail/Wurth-Elektronik/430473035826?qs=wr8lucFkNMX7XPiy2wLoYQ%3D%3D
U1: "ARM Microcontrollers - MCU 16/32-BITS MICROS", Manufacturer_Name=STMicroelectronics, Mouser Part Number=511-STM32H747IGT6, Arrow Part Number=STM32H747IGT6, Arrow Price/Stock=https://www.arrow.com/en/products/stm32h747igt6/stmicroelectronics?region=nac, Datasheet Link=https://www.mouser.com/datasheet/2/389/dm00602212-1799407.pdf, Geometry.Height=1.6mm, Manufacturer_Part_Number=STM32H747IGT6, Mouser Price/Stock=https://www.mouser.co.uk/ProductDetail/STMicroelectronics/STM32H747IGT6?qs=%252B6g0mu59x7Kw%252BsPEalqvLg%3D%3D
U3: "Integrated Circuit", Manufacturer_Name=Winbond, Mouser Part Number=454-W25Q256JVFIQ, Arrow Part Number=W25Q256JVFIQ, Arrow Price/Stock=https://www.arrow.com/en/products/w25q256jvfiq/winbond-electronics?region=nac, Datasheet Link=https://www.winbond.com/hq/search-resource-file.jsp?partNo=W25Q256JVFIQ&type=datasheet, Height=2.64mm, Manufacturer_Part_Number=W25Q256JVFIQ, Mouser Price/Stock=https://www.mouser.co.uk/ProductDetail/Winbond/W25Q256JVFIQ?qs=qSfuJ%252Bfl%2Fd66Mf%2FmOCw4Wg%3D%3D
U4: "Integrated Circuit", Manufacturer_Name="TE Connectivity", Mouser Part Number=824-MS561101BA03-50, Arrow Part Number=MS561101BA03-50, Arrow Price/Stock=https://www.arrow.com/en/products/ms561101ba03-50/te-connectivity?region=nac, Datasheet Link=http://www.te.com/usa-en/search.html?q=ms5611&source=header, Manufacturer_Part_Number=MS561101BA03-50, Mouser Price/Stock=https://www.mouser.co.uk/ProductDetail/Measurement-Specialties/MS561101BA03-50?qs=%252BgKeJhng5iV%252BnCz6Qd5iDw%3D%3D
U5: library part CMP-005-000000-1, Package=None, Availability=Unavailable, Component Type=Standard, Design Item ID=STLINK-V3MODS, MP=STLINK-V3MODS, Pin Count=32, Price=None, Source=STLINK-V3MODS.SchLib
U6: "Accelerometer", Manufacturer_Name=STMicroelectronics, Mouser Part Number=511-LSM6DSOTR, Arrow Part Number=LSM6DSOTR, Arrow Price/Stock=https://www.arrow.com/en/products/lsm6dsotr/stmicroelectronics?region=nac, Datasheet Link=https://www.st.com/resource/en/datasheet/lsm6dso.pdf, Manufacturer_Part_Number=LSM6DSOTR, Mouser Price/Stock=https://www.mouser.co.uk/ProductDetail/STMicroelectronics/LSM6DSOTR?qs=lc2O%252BfHJPVbD197C5c7oNw%3D%3D

## Free pads (board coordinates)
  round 60 hole 150 unplated mask+10: 2(200,200) 2(200,3340) 2(3340,200) 2(3340,3340)

## Via types
v1: diameter 24, hole 12, Top Copper to Bottom Copper, 135 vias

## Nets (pads, with @x,y where several pads share a name; then routed paths per layer and width w, separated by ;. In a path a pad name is that pad's centre, name@x,y a point inside that pad or via, vN(x,y) a via of type N, cw(c..) or ccw(c..) an arc to the next point about the centre after c; other vN are vias at no path point)
3V3: C1.2 C2.1 C3.2 C4.2 C5.1 C10.1 C11.1 C12.1 C13.1 C14.1 C15.1 C16.1 C17.1 C18.1 C19.1 C20.1 C21.1 C22.1 C23.1 C24.1 C25.1 C26.1 J1.4 J4.1 J4.2 J7.4 J11.39 J11.40 R1.2 R2.2 R3.2 R4.1 R5.2 R6.2 R9.2 R10.2 R12.2 R13.2 R14.2 R15.2 R16.2 R17.2 R18.2 U1.7 U1.8 U1.13 U1.25 U1.39 U1.40 U1.44 U1.48 U1.65 U1.71 U1.84 U1.92 U1.99 U1.113 U1.126 U1.136 U1.152 U1.160 U1.176 U3.1 U3.2 U3.3 U4.1 U4.2 U5.30 U6.5 U6.8 | length 5927.5
  Top Copper w6: R6.2 884.1,1790 v1(1002.31,1790) 1038.47,1790 R5.2 ; v1(1071,1527) 1073.51,1529.51 1102,1529.51 C13.1 1109.73,1537.24 1119.24,1537.24 1151.42,1569.42 U1.71 ; v1(1080.14,1674.14) 1115.86,1674.14 C12.1 1153.21,1674.28 1166.45,1687.53 U1.65 ; v1(1104.3,2035.28) C11.1 1139.98,2035.28 1146.83,2028.44 1146.83,2027.46 1151.99,2022.3 1209.89,2022.3 U1.48 ; v1(1104.3,2175.06) 1105.43,2173.93 1137.16,2173.93 C26.1 ; C26.1@1138.28,2178 U1.44@1288,2178 ; C14.1@1142.72,1275 1146.36,1271.36 1146.36,1242.64 v1(1148,1241) ; C14.1 1145.31,1277.59 1145.31,1293.31 1164.73,1312.73 1201.73,1312.73 U1.84@1202,1313 ; J1.4 1175,809.96 v1(1175,894) ; U1.84@1209.24,1314.29 U1.84 ; v1(1313,1052) 1315.59,1054.59 1315.59,1083.41 C15.1 1323.74,1091.56 1323.74,1100.4 1346.33,1122.99 1346.33,1156.52 U1.92 ; v1(1355.03,2263.07) 1356.16,2261.94 1356.16,2230.13 C10.1 ; C10.1@1357.28,2228.02 1366.51,2218.79 U1.40 U1.39 ; U3.1@1364.16,3105.16 U3.1@1366.57,3105.16 ; U3.3@1390.78,3015 U3.3 U3.2 ; U3.3@1401.56,3015 1426,3015 1506.53,2934.47 R10.2@1506.53,2682 ; U1.99 1485.4,1156.24 1485.4,1089.87 1523.99,1051.28 C16.1 1548.65,1049.63 1587.35,1049.63 v1(1589,1047.98) ; v1(1530.44,3241.75) 1530.44,3198.03 1517.69,3185.28 1515.72,3185.28 1445.44,3115 U3.1 U3.1@1366.57,3105.16 ; R4.1 1591.47,2966.53 1493,3065 U3.2 ; v1(1648,2268.11) 1651.44,2264.67 1651.44,2235.39 C25.1 ; C25.1@1656,2226 1659.07,2226 1661.79,2223.29 U1.25 ; v1(1682,2520) C1.2 1686.56,2473 U4.2 U4.1 ; U1.113 1760.21,1097.21 1769.72,1087.7 C17.1 ; C17.1@1769.59,1085.61 1771.36,1083.85 1771.36,1049.62 v1(1773,1047.98) ; C24.1@1847,2251.78 1898.01,2200.77 U1.13 ; C24.1 v1(1881.32,2260.28) ; R18.2 v1(1965,648) ; v1(1965,2293.79) 1962.7,2291.49 1962.7,2256.44 C5.1 1960.41,2253.16 1967.25,2246.32 1968.24,2246.32 1996.43,2218.12 U1.8 ; v1(2001,1054) 2003.74,1056.74 2003.74,1084.82 C18.1 2006.48,1088.55 2015.34,1097.4 2015.34,1156.24 U1.126 ; R2.2 2014.21,2538.11 v1(2014.21,2500.84) ; v1(2014,2293.79) 2016.04,2291.74 2016.04,2257.07 C23.1@2018.97,2254.15 ; R1.2 v1(2014.21,2781) ; U1.7 2016.9,2159.76 C23.1@2016.9,2252.96 ; C2.1@2162.84,2457.6 2162.84,2459.81 2175.75,2472.72 2177.96,2472.72 2184.08,2478.84 U6.5 ; v1(2163,2411) C2.1 ; U1.136 2302.62,1293.83 ; U1.152 2293.07,1608.79 C20.1 2300.5,1617.22 v1(2300.5,1656.5) ; U1.160 2406.73,1766.27 C21.1@2414.64,1758.36 ; U1.176 2234.62,2081.23 2258.39,2105 2309.4,2105 C22.1 2316.9,2099.02 2355.69,2099.02 v1(2356.45,2099.78) ; v1(2239.51,1033) R16.2 ; U6.8 2302.86,2543.32 C3.2 2315.55,2556 v1(2360,2556) ; v1(2296.8,254) J7.4 ; 2302.62,1293.82 2323.02,1293.82 2323.89,1292.95 2327.52,1292.95 C19.1 2336.62,1283.85 2369.2,1283.85 v1(2371.46,1281.59) ; R15.2 v1(2394,942.06) ; R3.2 v1(2418,2654) ; R9.2 v1(2421,1066.59) ; R13.2 2397.97,2275.5 2427.5,2275.5 2459.21,2307.21 2459.21,2315.69 R12.2 2470.53,2327 v1(2524,2327) ; C21.1 2422.84,1752.88 2434.92,1752.88 2447.97,1739.82 v1(2451.56,1739.82) ; v1(2445,999) 2482.88,999 R17.2 ; R14.2 v1(2552,1146) ; U3.2 U3.1@1366.57,3105.16
  Top Copper w20: J11.39 338.25,807 521.17,807 J11.40 572.23,818 631.47,758.77 635.23,758.77 v1(636,758)
  Bottom Copper w6: J4.2@698.1,818 699.1,817 701.19,819.09 J4.2@714.66,819.09 ; U5.30 v1(2169,727)
  Bottom Copper w20: v1(636,758) 636.77,758.77 640.87,758.77 698.1,816 J4.2@698.1,818 ; J4.2 732.18,806 907,806 J4.1
  other v1: 1026,1242
5V: J5.1 J5.2 J12.39 J12.40 | length 585.9
  Top Copper w6: J12.40@2954.56,818 J12.40@2974,798.56
  Top Copper w20: J12.39 2727.78,807 2910.71,807 J12.40 ; J12.40@2974,798.56 2974.23,798.32 2974.23,760.77 v1(2975,760)
  Bottom Copper w6: J5.2@2974,797 2995,818 J5.2 ; J5.2@2995,815 J5.2@3010.59,815
  Bottom Copper w20: J5.2@2974,797 2974,768 2974.23,767.77 2974.23,760.77 v1(2975,760) ; J5.2 3020.59,808 3199.41,808 J5.1
BOOT0: J12.38 R19.1 | length 1541.1
  Top Copper w6: R19.1@2596.3,1784.11 2631.02,1784.11 2640.13,1775 v1(2645,1775) ; v1(2629,968) 2831.65,968 2881.65,918 J12.38
  Bottom Copper w6: v1(2629,968) 2771,968 2850,1047 2850,1749 2832,1767 v1@2638,1767
GND: C1.1 C2.2 C3.1 C4.1 C5.2 C6.1 C7.2 C8.2 C9.2 C10.2 C11.2 C12.2 C13.2 C14.2 C15.2 C16.2 C17.2 C18.2 C19.2 C20.2 C21.2 C22.2 C23.2 C24.2 C25.2 C26.2 J1.3 J4.3 J4.4 J4.5 J4.6 J4.7 J4.8 J4.9 J4.10 J4.11 J4.12 J4.13 J4.14 J4.15 J4.16 J4.17 J4.18 J4.19 J4.20 J4.21 J4.22 J4.23 J4.24 J4.25 J4.26 J4.27 J4.28 J4.29 J4.30 J4.31 J4.32 J4.33 J4.34 J4.35 J4.36 J4.37 J4.38 J4.39 J4.40 J5.3 J5.4 J5.5 J5.6 J5.7 J5.8 J5.9 J5.10 J5.11 J5.12 J5.13 J5.14 J5.15 J5.16 J5.17 J5.18 J5.19 J5.20 J5.21 J5.22 J5.23 J5.24 J5.25 J5.26 J5.27 J5.28 J5.29 J5.30 J5.31 J5.32 J5.33 J5.34 J5.35 J5.36 J5.37 J5.38 J5.39 J5.40 J7.6 J11.01 J11.02 J11.11 J11.13 J11.15 J11.17 J11.19 J11.21 J11.23 J11.25 J11.27 J11.29 J11.31 J11.33 J11.35 J11.37 J12.01 J12.02 J12.04 J12.06 J12.08 J12.10 J12.12 J12.14 J12.16 J12.18 J12.20 J12.22 J12.24 J12.26 J12.28 J12.30 J12.32 J12.34 J12.36 R7.2 R8.2 R11.1 S1.1 U1.6 U1.12 U1.24 U1.38 U1.45 U1.47 U1.64 U1.70 U1.81 U1.83 U1.93 U1.100 U1.112 U1.119 U1.134 U1.137 U1.151 U1.159 U1.173 U1.174 U3.10 U4.3 U4.4 U5.24 U6.1 U6.2 U6.3 U6.6 U6.7 | length 17864
  Top Copper w6: J11.37@329.27,925 329.27,1218 329.27,1518 329.27,2018 329.27,2225 316.82,2237.44 266.56,2237.44 215,2289 215,2650.79 289.21,2725 299.44,2725 534.19,2725 J11.02@532.17,2727.01 ; v1(650.25,3056) S1.1 ; v1(1040.63,1404) 1025,1388.37 C7.2 1070.79,1360.04 1084.09,1373.35 1209.24,1373.35 U1.81 ; v1(1070,1570) 1071.28,1568.72 1103.23,1568.72 C13.2 1105.49,1567.45 1127.14,1589.1 U1.70 ; v1(1080.14,1727.68) 1085.01,1727.68 1096.17,1716.52 C12.2@1108.17,1716.52 ; v1(1103,2078) 1106.44,2074.56 1135.16,2074.56 C11.2 ; v1(1104.3,2137.37) C26.2 1180.63,2137.37 1210.02,2107.98 U1.45 ; C14.2@1104.64,1277.64 1104.64,1241.36 v1(1105,1241) ; C12.2@1108.17,1716.56 1115.01,1709.72 C12.2 ; C14.2 1110.31,1278.03 1110.31,1293.31 1150,1333 U1.83@1211,1333 ; C12.2@1116,1707.21 U1.64 ; v1(1133.26,3003.44) 1133.26,2961.3 C6.1 ; C11.2@1139,2069.28 1148.72,2069.28 1176.14,2041.86 U1.47 U1.47@1209.24,2042.64 ; v1(1174,549) J1.3 ; v1(1359,1052) 1356.31,1054.69 1356.31,1083.31 C15.2 1353.61,1086.98 1366.51,1099.88 U1.93 ; v1(1392.72,2263.07) C10.2 1392.72,2228.02 1405.88,2214.85 U1.38 ; U1.100@1505.09,1182.56 1504.31,1181.78 U1.100 1505.09,1156.24 1505.09,1110.47 1528.84,1086.72 C16.2 1549.64,1089.36 1586.36,1089.36 v1(1589,1092) ; v1(1585.56,3241.75) 1585.56,3198.03 1598.31,3185.28 1600.28,3185.28 1655,3130.56 1655,2838 1678,2815 U3.10 ; R7.2 v1(1615,308) ; U1.24 1681.47,2220.44 1687.03,2226 C25.2@1691.72,2226 ; v1(1682,2383) C1.1 1683.35,2423.79 U4.3 U4.4 ; C25.2 v1(1691.16,2268.11) ; v1(1731,1048) 1732.64,1049.64 1732.64,1085.08 C17.2 1739.75,1092.18 1739.75,1156.24 U1.112 ; C24.2 1847.79,2294.93 1921.94,2294.93 v1(1922.72,2294.15) ; U1.119@1877.54,1156.24 U1.119 v1(1878.32,1097.4) ; R8.2 v1(1903.54,311) ; U1.12 1917.69,2246.86 C5.2 1923.85,2255.27 1923.85,2293.8 v1@1922.72,2294.93 ; U1.6 2035.8,2218.54 2053.52,2236.26 C23.2 ; C18.2 2041.96,1087.52 v1(2042,1053) v1(2042,1053) ; C23.2@2054.04,2253.79 2055.76,2255.51 2055.76,2291.55 v1(2058,2293.79) ; U6.1@2157.18,2603.18 U6.1 U6.2 ; U6.3 U6.2 ; v1(2210.19,254) J7.6 ; U1.134 2257.54,1254.46 2273,1239 v1(2273,1202) ; U1.137 C19.2@2327.24,1313.51 ; U1.151 2292.2,1589.1 2300.02,1581.28 C20.2 v1(2340,1581.28) ; U1.159 2390.54,1746.58 2405.99,1731.13 2409.16,1731.13 C21.2 2416.98,1724.28 2435.95,1705.32 2447.83,1705.32 v1(2451.27,1701.88) ; U1.173 2386.68,2022.17 2414.23,2049.73 C9.2 C8.2 2415.11,2099.01 v1(2415.11,2140.11) ; U1.174 2294.18,2041.86 2315.16,2062.83 C22.2 2316.79,2062.19 2355.81,2062.19 v1(2356.45,2061.54) ; v1(2218.12,2411) C2.2 2218.12,2459.97 2203.77,2474.32 U6.6 ; C19.2@2327.52,1314.7 C19.2 ; C19.2@2335.27,1321.54 2338.35,1324.63 2368.98,1324.63 v1(2372.07,1327.71) ; v1(2360,2500.25) C3.1 2255.69,2500.25 2223.45,2532.49 U6.7 U6.6 ; R11.1 v1(2599.36,1891) ; J12.01@2716.78,2720 2921.71,2720 J12.02 J12.04 J12.06 J12.08 J12.10 J12.12 J12.14 J12.16 J12.18 J12.20 J12.22 J12.24 J12.26 J12.28 J12.30 J12.32 J12.34 J12.36 ; U6.2 2182.75,2582.69 2203.77,2561.67 U6.6
  Top Copper w20: v1(243.75,916.67) J11.37@327.25,916.67 ; v1(243.75,1815.67) J11.19@288.31,1815.67 ; v1(294,2775) 294,2730.44 J11.01@299.44,2725 ; J11.02@532.17,2727.01 562.57,2727.01 566,2730.44 v1(566,2775) ; v1(2679,2772) 2679,2730.44 2685.61,2723.83 J12.01@2718.25,2723.83 ; J12.02@2920.25,2724.83 2948.39,2724.83 2954,2730.44 v1(2954,2773) ; J12.36@2962.25,1015.31 2963.25,1015.31 2973,1005.56 v1(2973,969) ; v1(2973.33,1771.75) J12.20@2973.33,1816.31
  Bottom Copper w6: U5.24 2106,1025 v1(2169,1025) ; J5.3@3185.9,929 3185.9,918 J5.3
  Bottom Copper w15: J5.22@2973.33,1800.5 2990.83,1818 3009,1818 J5.22
  Bottom Copper w20: v1(639,1826) 639.77,1825.23 685.1,1825.23 688.34,1828.47 J4.22@688.34,1829.21 ; v1(650.78,915.21) J4.4@695.34,915.21 ; J4.40@717.5,2716.99 J4.40@717.63,2717.11 ; J4.4@717.63,918 717.63,1218 717.63,1518 717.63,1818 717.63,1916.42 717.63,2018 717.63,2318 717.63,2518 J4.40@717.63,2717.11 ; v1@717.63,2771.42 J4.40@717.63,2717.11 ; J4.40@718,2717.49 J4.40@717.63,2717.11 ; J4.4@721.56,927.08 J4.3@920,927.08 ; J4.40@721.56,2727.08 J4.39@920,2727.08 ; J4.3@920,918 J4.3@920,927.08 ; v1(920,2773) J4.39@920,2727.08 ; J4.3@921.56,927.08 J4.3@920,927.08 ; J4.39@921.56,2727.08 J4.39@920,2727.08 ; v1(2973.33,1771.75) J5.22@2973.33,1800.5 ; J5.4@3009,929 3009,1118 3009,1418 3009,1718 3009,1818 3009,1918 3009,2118 3009,2418 v1(3009,2773) ; J5.4 3021.59,929 3185.9,929 3198.41,929 J5.3 ; J5.40 3020.59,2728 3199.41,2728 J5.39 J5.37 ; J5.39@3209.41,2728 v1@3209.41,2774.59 ; J5.3@3209.94,918 3209.94,1118 3209.94,1418 3209.94,1518 3209.94,1618 3209.94,2218 3209.94,2518 J5.37@3209.94,2618 ; J5.3@3234.66,917.79 v1(3279.22,917.79) ; J5.21@3234.66,1816.79 v1(3279.22,1816.79) ; J4.3@920,927.08 920,1618 920,1818 920,1918 920,2118 920,2418 920,2518 J4.39@920,2727.08
  other v1: 718,2775 3209,2775
"GPIO PA2": LED1.2 U1.130 | length 1084.7
  Top Copper w6: LED1.2 1455,408 2094.86,1047.86 U1.130
"GPIO PA3": LED2.2 U1.131 | length 984.4
  Top Copper w6: LED2.2@1738,328.62 1738,616 2114.54,992.54 U1.131
"GPIO PA4": J11.07 U1.49 | length 1387
  Top Copper w6: J11.07@264.99,2425 J11.07@347.52,2425 ; J11.07@371,2422 420,2471 1058,2471 1075,2454 1075,2028 1099.73,2003.27 1210.8,2003.27 U1.49
"GPIO PA15": J12.37 U1.139 | length 860
  Top Copper w6: U1.139 2212.76,1353.66 2254.75,1353.66 2293.35,1392.25 2365.81,1392.25 2603,1155.06 2603,936 2638,901 2699.78,901 J12.37
"GPIO PB0": J11.10 U1.55 | length 857.5
  Top Copper w6: J11.10 623,2318 1056.62,1884.38 U1.55
"GPIO PB1": J11.12 U1.56 | length 825.1
  Top Copper w6: J11.12@534.19,2225 642,2225 1002.31,1864.69 U1.56
"GPIO PB2": J11.09 U1.57 | length 1119.6
  Top Copper w6: J11.09@347.52,2325 421.31,2325 456,2290.31 456,2190.85 464.29,2182.56 479.85,2167 637,2167 958.99,1845.01 U1.57
"GPIO PB3": J12.23 U1.162 | length 585.8
  Top Copper w6: U1.162 2458.36,1805.64 2648.8,1615.2 2711.58,1615.2 2711.78,1615 J12.23@2716.78,1620
"GPIO PB4": J12.21 U1.163 | length 563.4
  Top Copper w6: U1.163 2478.98,1825.32 2602.42,1701.88 2698.66,1701.88 J12.21@2716.78,1720
"GPIO PB5": J12.19 U1.164 | length 527.1
  Top Copper w6: U1.164 2494.99,1845.01 2534.36,1805.64 2664.36,1805.64 2678.73,1820 J12.19@2716.78,1820
"GPIO PC3_C": U1.37 U6.4 | length 1095.5
  Top Copper w6: v1(1388,2380) 1425.57,2342.43 U1.37 ; v1(1960,2569) 2098.1,2569 2123.79,2543.32 U6.4
  Bottom Copper w6: v1(1388,2380) 1576.44,2568.44 1959.44,2568.44 v1(1960,2569)
"GPIO PC4": J11.03 U1.53 | length 1468.1
  Top Copper w6: J11.03 415,2618 467,2566 1005,2566 v1(1035,2536) ; v1(1036,2438) 1036,2026.65 1138.9,1923.75 U1.53
  Bottom Copper w6: v1(1035,2536) 1036,2535 v1(1036,2438)
"GPIO PC5": J11.05 U1.54 | length 1385.7
  Top Copper w6: J11.05@281,2516 239,2474 239,2387 260,2366 647,2366 1108.94,1904.06 U1.54 ; J11.05 346.69,2498.56 J11.05@387.44,2498.56
"GPIO PC10": J7.2 R9.1 U1.140 | length 1201
  Top Copper w6: U1.140 2211.21,1371.79 2178.06,1371.79 2154,1347.73 2154,1239.06 2311.76,1081.31 2315.69,1081.31 2326.47,1070.53 R9.1 ; R9.1@2328.47,1063.53 2328.47,1003.59 2328.47,971.59 2328.47,450.53 2383.42,395.58 J7.2
"GPIO PC15": R10.1 U1.11 U3.7 | length 1355.5
  Top Copper w6: R10.1@1454,2682 1454,2791 1430,2815 U3.7 1319,2815 1308,2804 1308,2696 1547,2457 v1(1547,2314) ; U1.11 1937.38,2208.36 1942.69,2213.67 v1(1942.69,2218.54)
  Bottom Copper w6: v1(1547,2314) 1694,2314 1789.46,2218.54 v1(1942.69,2218.54)
"GPIO PD14": J11.30 U1.97 | length 1501.5
  Top Copper w6: J11.30@486,1316 441,1271 441,1097 475,1063 633,1063 751,945 1419,945 1444.47,970.47 1444.47,1156.24 U1.97
"GPIO PE0": J12.13 U1.170 | length 569.8
  Top Copper w6: U1.170 2475.12,1963.12 2627,2115 2711.78,2115 J12.13@2716.78,2120
"GPIO PE1": J12.11 U1.171 | length 603.1
  Top Copper w6: U1.171 2438.35,1982.8 2654.1,2198.56 2695.34,2198.56 J12.11@2716.78,2220
"GPIO PG15": J12.25 U1.161 | length 650
  Top Copper w6: U1.161@2212.76,1785.95 2441.45,1785.95 2606,1621.4 2606,1550 2638.8,1517.2 J12.25@2709.58,1517.2
I2C1-SCL: J12.05 R12.1 U1.165 | length 1108.3
  Top Copper w6: U1.165 2186.44,1865.47 2157.53,1865.47 2065,1958 2065,2020 2430,2385 R12.1@2470,2385 ; R12.1 2473.94,2385.53 2484.72,2396.31 2484.72,2400.25 2599.47,2515 2711.78,2515 J12.05@2716.78,2520
I2C1-SDA: J12.03 R13.1 U1.166 | length 1399.9
  Top Copper w6: U1.166 2211.2,1885.16 2168.84,1885.16 2084,1970 2084,2008 2290.47,2214.47 R13.1 2479.47,2214.47 2569,2304 2569,2423 2611,2465 2791,2465 2820,2494 2820,2557 2778.44,2598.56 2736.23,2598.56 J12.03
I2C2-SCL: R1.1 U1.19 U4.8 U6.13 | length 900.7
  Top Copper w6: U1.19 1779.9,2309.32 1803,2332.42 1803,2486 U4.8@1837,2520 ; U4.8 1849.61,2588.91 1946.17,2685.47 R1.1 2156.57,2685.47 2203.77,2638.28 U6.13 U6.13@2203.77,2602.66
I2C2-SDA: R2.1 U1.18 U4.7 U6.14 | length 851.9
  Top Copper w6: U1.18 1800.36,2159.76 1800.36,2295.09 1834.27,2329 1877,2329 1895,2347 1895,2435 U4.7@1858.23,2471.77 ; U4.7@1830.96,2463.96 1830.96,2464.19 1839.77,2473 U4.7 1859.46,2473 1868.27,2481.81 1868.27,2482.27 1912,2526 1912,2581 1928.53,2597.53 2095.53,2597.53 2120,2622 2175.28,2622 2184.08,2613.2 U6.14
I2C4-SCL: J11.14 R5.1 U1.62 | length 832.6
  Top Copper w6: J11.14@534.19,2125 547.93,2125 554.93,2118 628.02,2118 920.02,1826 1065.53,1826 R5.1 1123.59,1792 1168.23,1747.36 1209.24,1747.36 U1.62
I2C4-SDA: J11.16 R6.1 U1.63 | length 781.1
  Top Copper w6: J11.16@552.44,2025 576.6,2000.84 600.16,2000.84 776.01,1824.99 R6.1 860.05,1755 1125,1755 1152.32,1727.68 1209.24,1727.68 U1.63
NetJ7_1: J7.1 R17.1 | length 650.3
  Top Copper w6: J7.1 2426.72,395.72 2484,453 R17.1@2484,935
NetJ7_8: J7.8 R18.1 | length 313.6
  Top Copper w6: R18.1@1973,531 2022,531 2123.57,429.43 J7.8
NetLED1_1: LED1.1 R7.1 | length 103.1
  Top Copper w6: LED1.1@1454.8,262 R7.1
NetLED2_1: LED2.1 R8.1 | length 108.5
  Top Copper w6: LED2.1@1738,259 R8.1
NetR3_1: R3.1 U6.12 | length 128.6
  Top Copper w6: U6.12 2223.45,2639.45 2236.47,2652.47 R3.1@2316,2652.47
NetR4_2: R4.2 U3.9 | length 143.3
  Top Copper w6: R4.2@1651,2688 1703,2688 1737.43,2722.43 U3.9
NetR11_2: R11.2 R19.2 U1.167 | length 408.2
  Top Copper w6: U1.167 2212.76,1903.28 2289.72,1903.28 2302,1891 R11.2 2486.47,1887.06 2497.25,1876.28 2501.19,1876.28 2532.47,1845 2579.47,1845 R19.2@2589.3,1835.17
NRST(Reset): C6.2 S1.4 U1.33 | length 1028.6
  Top Copper w6: S1.4 C6.2@1135,2898.52 ; C6.2 C6.2@1135,2898.52 ; U1.33 1504.31,2425.69 1135,2795 C6.2@1135,2898.52
QSPI-CLK: J11.18 U1.30 | length 1675.8
  Top Copper w6: v1(428,2262) 428,1981 471.56,1937.44 521.75,1937.44 J11.18@534.19,1925 ; v1(1222,2149) 1222,2147 1286.9,2082.1 1524.93,2082.1 1563.36,2120.53 U1.30
  PWR w6: v1(428,2262) 1109,2262 v1(1222,2149)
QSPI_BK1_IO0: J11.22 U1.94 | length 1379.4
  Top Copper w6: J11.22 551.62,1698.56 606.44,1698.56 634,1671 v1(634,1567) ; v1(634,1491) 679,1491 1150.39,1019.61 1373.61,1019.61 1386.98,1032.98 1386.98,1156.24 U1.94
  Bottom Copper w6: v1(634,1491) v1(634,1567)
QSPI_BK1_IO1: J11.24 U1.95 | length 1547.3
  Top Copper w6: J11.24@491,1618 440,1567 440,1491 473,1458 651,1458 1114.32,994.68 1393.68,994.68 1405.1,1006.1 1405.1,1156.24 U1.95 ; J11.24@528,1617 573.23,1617 591.67,1598.56 J11.24@591.67,1597.33
QSPI_BK1_IO2: J11.20 U1.1 | length 1847.6
  Top Copper w6: J11.20@552.44,1825 578.88,1798.56 756.39,1798.56 854.95,1700 v1(1027,1700) ; v1(1615,1794) 1810,1794 2133.45,2117.45 2133.45,2158.21 U1.1
  Bottom Copper w6: v1(1027,1700) 1521,1700 v1(1615,1794)
QSPI_BK1_IO3: J11.28 U1.96 | length 1241.5
  Top Copper w6: J11.28@552.44,1425 630,1425 1088,967 1406.21,967 1424.79,985.58 1424.79,1156.24 U1.96
QSPI_BK1_NCS: J11.26 U1.78 | length 809.5
  Top Copper w6: J11.26@472.67,1539.33 472.67,1537.44 485.12,1525 J11.26@539.17,1525 ; J11.26 J11.26@539.17,1525 ; J11.26@552.44,1525 J11.26@539.17,1525 ; U1.78 789.38,1431.62 692,1529 543.17,1529 J11.26@539.17,1525
QSPI_BK2_IO0: J11.32 U1.67 | length 940.6
  Top Copper w6: J11.32@576.86,1219.85 576.86,1222.63 591.67,1237.44 594.46,1237.44 634,1276.98 v1(634,1368) ; v1(829,1666) 846.84,1648.16 U1.67
  PWR w6: v1(634,1368) 829,1563 v1(829,1666)
QSPI_BK2_IO1: J11.34 U1.68 | length 953.2
  Top Copper w6: J11.34@521.75,1137.44 J11.34@534.19,1125 ; J11.34 572.23,1118 623.79,1169.56 630.56,1169.56 v1(634,1173) ; v1(1005,1623.16) 1009.87,1623.16 1015.18,1628.47 U1.68
  PWR w6: v1(634,1173) 1005,1544 v1(1005,1623.16)
QSPI_BK2_IO2: J11.36 U1.69 | length 1703.8
  Top Copper w6: J11.36 453,1018 409,1062 409,1739 434,1764 648,1764 815,1597 1094.48,1597 1105.49,1608.01 1209.24,1608.01 U1.69
QSPI_BK2_IO3: J11.38 U1.72 | length 976.8
  Top Copper w6: J11.38@534.19,925 545.11,935.92 599.92,935.92 v1(634,970) ; v1(1053,1461) 1081.04,1461 1169.77,1549.73 U1.72
  PWR w6: v1(634,970) 634,1042 v1(1053,1461)
SPI1-CLK: J7.5 R15.1 U1.50 | length 2238.5
  Top Copper w6: U1.50 1383.9,1982.8 2289.8,1076.91 2289.8,942.06 2289.8,463.31 2253.5,427.01 J7.5
SPI1-MISO: J7.7 R16.1 U1.51 | length 2173.6
  Top Copper w6: U1.51 1346.88,1963.12 2070.94,1239.06 2105.01,1239.06 2184.39,1159.68 2184.39,1064.05 2194,1054.44 2194,454.13 2166.88,427.01 J7.7
SPI1-MOSI: J7.3 R14.1 U1.52 | length 2680
  Top Copper w6: U1.52 1311.57,1943.43 v1(1927,1328) ; v1(2319,1202) 2397.53,1202 2548.06,1051.47 R14.1 ; J7.3 2340.11,282.89 2352,271 2459,271 2552,364 R14.1@2552,1050.47
  PWR w6: v1(1927,1328) 1927,1326 1993,1260 2261,1260 v1(2319,1202)
SPI2-MISO: J11.06 U1.36 | length 1189.3
  Top Copper w6: J11.06 547.17,2503 1319,2503 1445.25,2376.75 U1.36
SPI2-MOSI: J11.04 U1.35 | length 1268.2
  Top Copper w6: J11.04 1254,2618 1464.94,2407.06 U1.35
SPI2-SCK: J11.08 U1.86 | length 1818.1
  Top Copper w6: J11.08@552.44,2425 561.44,2416 744,2416 v1(999,2161) ; U1.86 1286.14,1274.14 1356,1344 1356,1831 v1(1326,1861)
  Bottom Copper w6: v1(999,2161) 999,1979 1084,1894 1293,1894 v1(1326,1861)
SPI5-CLK: U1.27 U3.16 | length 1110.3
  Top Copper w6: U1.27 1622.42,2504.42 1828,2710 1828,3076 1790,3114 U3.16@1738.43,3114 ; U3.16@1737,3114 U3.16@1738.43,3114 ; U3.16 U3.16@1738.43,3114
SPI5-MISO: U1.29 U3.8 | length 734.1
  Top Copper w6: U3.8@1331.57,2754.22 1342.35,2765 U3.8 ; U3.8@1369,2765 1369,2710 1583.05,2495.95 U1.29
SPI5-MOSI: U1.28 U3.15 | length 1049.5
  Top Copper w6: U1.28 1602.87,2159.12 1602.87,2530.87 1804,2732 1804,3054 1793.91,3064.09 1738.35,3064.09 U3.15
SPI6-MISO: J12.35 U1.156 | length 1198.9
  Top Copper w6: U1.156 2315.94,1687.53 2541.47,1462 2778.11,1462 2802,1438.11 2802,1065.16 2776.28,1039.44 2776.28,1037.44 2758.84,1020 J12.35@2716.78,1020 ; J12.35@2661.84,1015 J12.35@2681.28,1034.44
SPI6-MOSI: J12.31 U1.158 | length 834.3
  Top Copper w6: U1.158 2369.1,1726.9 v1(2606,1490) ; v1(2604,1369) 2604,1290.73 2674.73,1220 J12.31@2716.78,1220
  Bottom Copper w6: v1(2604,1369) 2605,1370 2605,1489 v1(2606,1490)
SPI6-SCK: J12.33 U1.157 | length 902.6
  Top Copper w6: U1.157 2342.79,1707.21 v1(2560,1490) ; v1(2560,1384) 2560,1260 2657.28,1162.72 2657.28,1124.56 J12.33@2661.84,1120 ; J12.33@2671.59,1137.44 2689.03,1120 J12.33@2716.78,1120
  Bottom Copper w6: v1(2560,1384) v1(2560,1490)
SWCLK: J1.1 U1.138 U5.13 | length 2096.1
  Top Copper w6: J1.1 1074,681.6 1052,703.6 1015.4,703.6 998,721 998,874 1046,922 v1(1444.47,922) ; U1.138 2270.81,1333.2 2276.12,1338.51 v1(2280.99,1338.51)
  Bottom Copper w6: v1(1444.47,922) 1449.34,922 1459.51,932.17 1459.76,932.17 1466,938.41 1466,1212 1481,1227 U5.13 1543.55,1242.93 1776.93,1242.93 1963,1429 2087,1429 2138.29,1429 2154.4,1412.89 2154.4,1361.6 2179,1337 2279.48,1337 v1(2280.99,1338.51)
SWDIO: J1.2 U1.132 U5.4 | length 1481.5
  Top Copper w6: v1(1025,753) 1052,753 1074,775 J1.2 ; v1(1965,763) 1966,763 2134.23,931.23 U1.132
  Bottom Copper w6: v1(1025,753) 1040,738 1461.77,738 1484.84,761.07 U5.4@1511.68,761.07 ; U5.4@1543.55,761.07 1963.07,761.07 v1(1965,763)
UART4-RX: J12.17 U1.168 | length 506.4
  Top Copper w6: U1.168 2713.04,1923.75 J12.17@2716.78,1920
UART4-TX: J12.15 U1.169 | length 536.5
  Top Copper w6: U1.169 2510.16,1943.43 2581.72,2015 2711.78,2015 J12.15@2716.78,2020
UART5-RX: J12.27 U1.145 | length 525.9
  Top Copper w6: U1.145 2271,1470.99 2305.99,1436 2700.78,1436 J12.27@2716.78,1420
UART5-TX: J12.29 U1.142 | length 547.9
  Top Copper w6: U1.142 2598.58,1411.94 2664.59,1345.93 2664.59,1337.44 2682.03,1320 J12.29@2716.78,1320
USART2-RX: J12.07 U1.149 | length 1639.9
  Top Copper w6: U1.149 2212.62,1550.37 2392.37,1550.37 v1(2393,1551) ; v1(2638,1669) 2639,1668 2782,1668 2806,1692 2806,2245 2782,2269 2641.5,2269 2610,2300.5 2610,2393 2635,2418 J12.07@2711.78,2418 ; J12.07@2711.78,2415 J12.07@2714.78,2418 ; J12.07 J12.07@2714.78,2418 ; J12.07@2716.78,2420 J12.07@2714.78,2418
  PWR w6: v1(2393,1551) v1@2393,1551.67
  Bottom Copper w6: v1@2393,1551.67 2510.33,1669 v1(2638,1669)
USART2-TX: J12.09 U1.148 | length 1479.1
  Top Copper w6: U1.148 2272.88,1530.05 2305.93,1497 v1(2461,1497) ; v1(2638,1569) 2789,1569 2826,1606 2826,2274 2785,2315 2711.78,2315 J12.09@2716.78,2320
  PWR w6: v1(2461,1497) v1@2462.85,1498.85
  Bottom Copper w6: v1@2462.85,1498.85 2476.85,1498.85 2547,1569 v1(2638,1569)
USART6-RX: J1.5 U1.123 U5.12 | length 1553.1
  Top Copper w6: J1.5@1274,681.6 J1.5 1296,666 1296,706.62 1309.38,720 1608,720 1957.06,1069.06 U1.123
  Bottom Copper w6: U5.12 1543.55,1192.93 1651.93,1192.93 1678,1166.87 v1(1678,790)
USART6-TX: J1.6 U1.122 U5.15 | length 1563.3
  Top Copper w6: J1.6@1257.96,862.6 1271.1,849.46 J1.6@1274,846.56 ; v1(1272,896) 1272,810.96 J1.6 J1.6@1274,846.56 ; U1.122 1937.38,1106.38 1716,885 1314,885 1297.56,868.56 1296,868.56 J1.6@1274,846.56
  Bottom Copper w6: v1(1272,896) 1272,1168 1415.07,1311.07 1511.69,1311.07 U5.15
VCAP: C8.1 C9.1 U1.80 U1.133 U1.172 | length 2349.3
  Top Copper w6: U1.80 1210.8,1391.47 1328.53,1391.47 v1(1330,1390) ; v1(1660,1547) 1919,1288 v1(1919,1255) ; v1(2114.54,2002.49) U1.172 2421.49,2002.49 2449.66,2030.66 C9.1 C8.1 ; U1.133 2224.09,1234.77 2227,1231.87 v1(2227,1202)
  PWR w6: v1(1919,1255) 1972,1202 v1(2227,1202)
  Bottom Copper w6: v1(1330,1390) 1377,1390 1534,1547 v1(1660,1547) 1660,1547.47 2114.54,2002.02 v1(2114.54,2002.49)
VDDLDO: C7.1 U1.82 U1.135 U1.175 | length 2605.3
  Top Copper w6: 1026,1242 1026,1288.57 C7.1 1033.22,1297.79 1065.79,1297.79 v1(1104,1336) 1104.18,1336 1121.06,1352.88 U1.82 ; U1.135@2211.81,1274.14 U1.135 2291.86,1274.14 v1(2298,1268) ; U1.175 2258.67,2061.54 2269.13,2072 v1(2274,2072)
  Bottom Copper w6: v1(1104,1336) 1104,1336.06 1120.94,1353 1408,1353 1521.88,1466.88 1715.88,1466.88 v1(1941,1692) ; v1(2274,2072) 2271.38,2072 2261.49,2062.1 2170.1,2062.1 2156,2048 2155.98,1906.98 v1(1941,1692) ; v1(2298,1268) 2298,1309.9 2305.99,1317.89 2305.99,1359.92 2272.91,1393 2179,1393 2170.4,1401.6 2170.4,1462.6 v1(1941,1692)
pads on no net: J1.7 J1.8 J1.9 J1.10 J4.41 J4.42 J5.41 J5.42 J7.9 J7.10 J7.11 J7.12 J7.13 J7.14 J7.15 J11. J12. LED1.3 LED1.4 LED2.3 LED2.4 S1.2 S1.3 U1.2 U1.3 U1.4 U1.5 U1.9 U1.10 U1.14 U1.15 U1.16 U1.17 U1.20 U1.21 U1.22 U1.23 U1.26 U1.31 U1.32 U1.34 U1.41 U1.42 U1.43 U1.46 U1.58 U1.59 U1.60 U1.61 U1.66 U1.73 U1.74 U1.75 U1.76 U1.77 U1.79 U1.85 U1.87 U1.88 U1.89 U1.90 U1.91 U1.98 U1.101 U1.102 U1.103 U1.104 U1.105 U1.106 U1.107 U1.108 U1.109 U1.110 U1.111 U1.114 U1.115 U1.116 U1.117 U1.118 U1.120 U1.121 U1.124 U1.125 U1.127 U1.128 U1.129 U1.141 U1.143 U1.144 U1.146 U1.147 U1.150 U1.153 U1.154 U1.155 U3.4 U3.5 U3.6 U3.11 U3.12 U3.13 U3.14 U4.5 U4.6 U5.1 U5.2 U5.3 U5.5 U5.6 U5.7 U5.8 U5.9 U5.10 U5.11 U5.14 U5.16 U5.17 U5.18 U5.19 U5.20 U5.21 U5.22 U5.23 U5.25 U5.26 U5.27 U5.28 U5.29 U5.31 U5.32 U6.9 U6.10 U6.11

## Polygon pours and split planes (outlines as drawn)
GND on GND "GND_L02_P003" (solid, pour order 3): 0,3470 cw(c70,3470) 70,3540 330,3540 495,3375 3045,3375 3210,3540 3471,3540 cw(c3471,3471) 3540,3471 3540,3210 3375,3045 3375,495 3540,330 3540,70 cw(c3470,70) 3470,0 3210,0 3045,165 495,165 330,0 70,0 cw(c70,70) 0,70 0,330 165,495 165,3045 0,3210
3V3 on PWR "3V3_PWR" (solid, pour order 2): 0,3470 cw(c70,3470) 70,3540 330,3540 495,3375 3045,3375 3210,3540 3471,3540 cw(c3471,3471) 3540,3471 3540,3210 3375,3045 3375,495 3540,330 3540,70 cw(c3470,70) 3470,0 3210,0 3045,165 495,165 330,0 70,0 cw(c70,70) 0,70 0,330 165,495 165,3045 0,3210